# Allegro board pc053a_toplevel_33_ans_16-5.brd
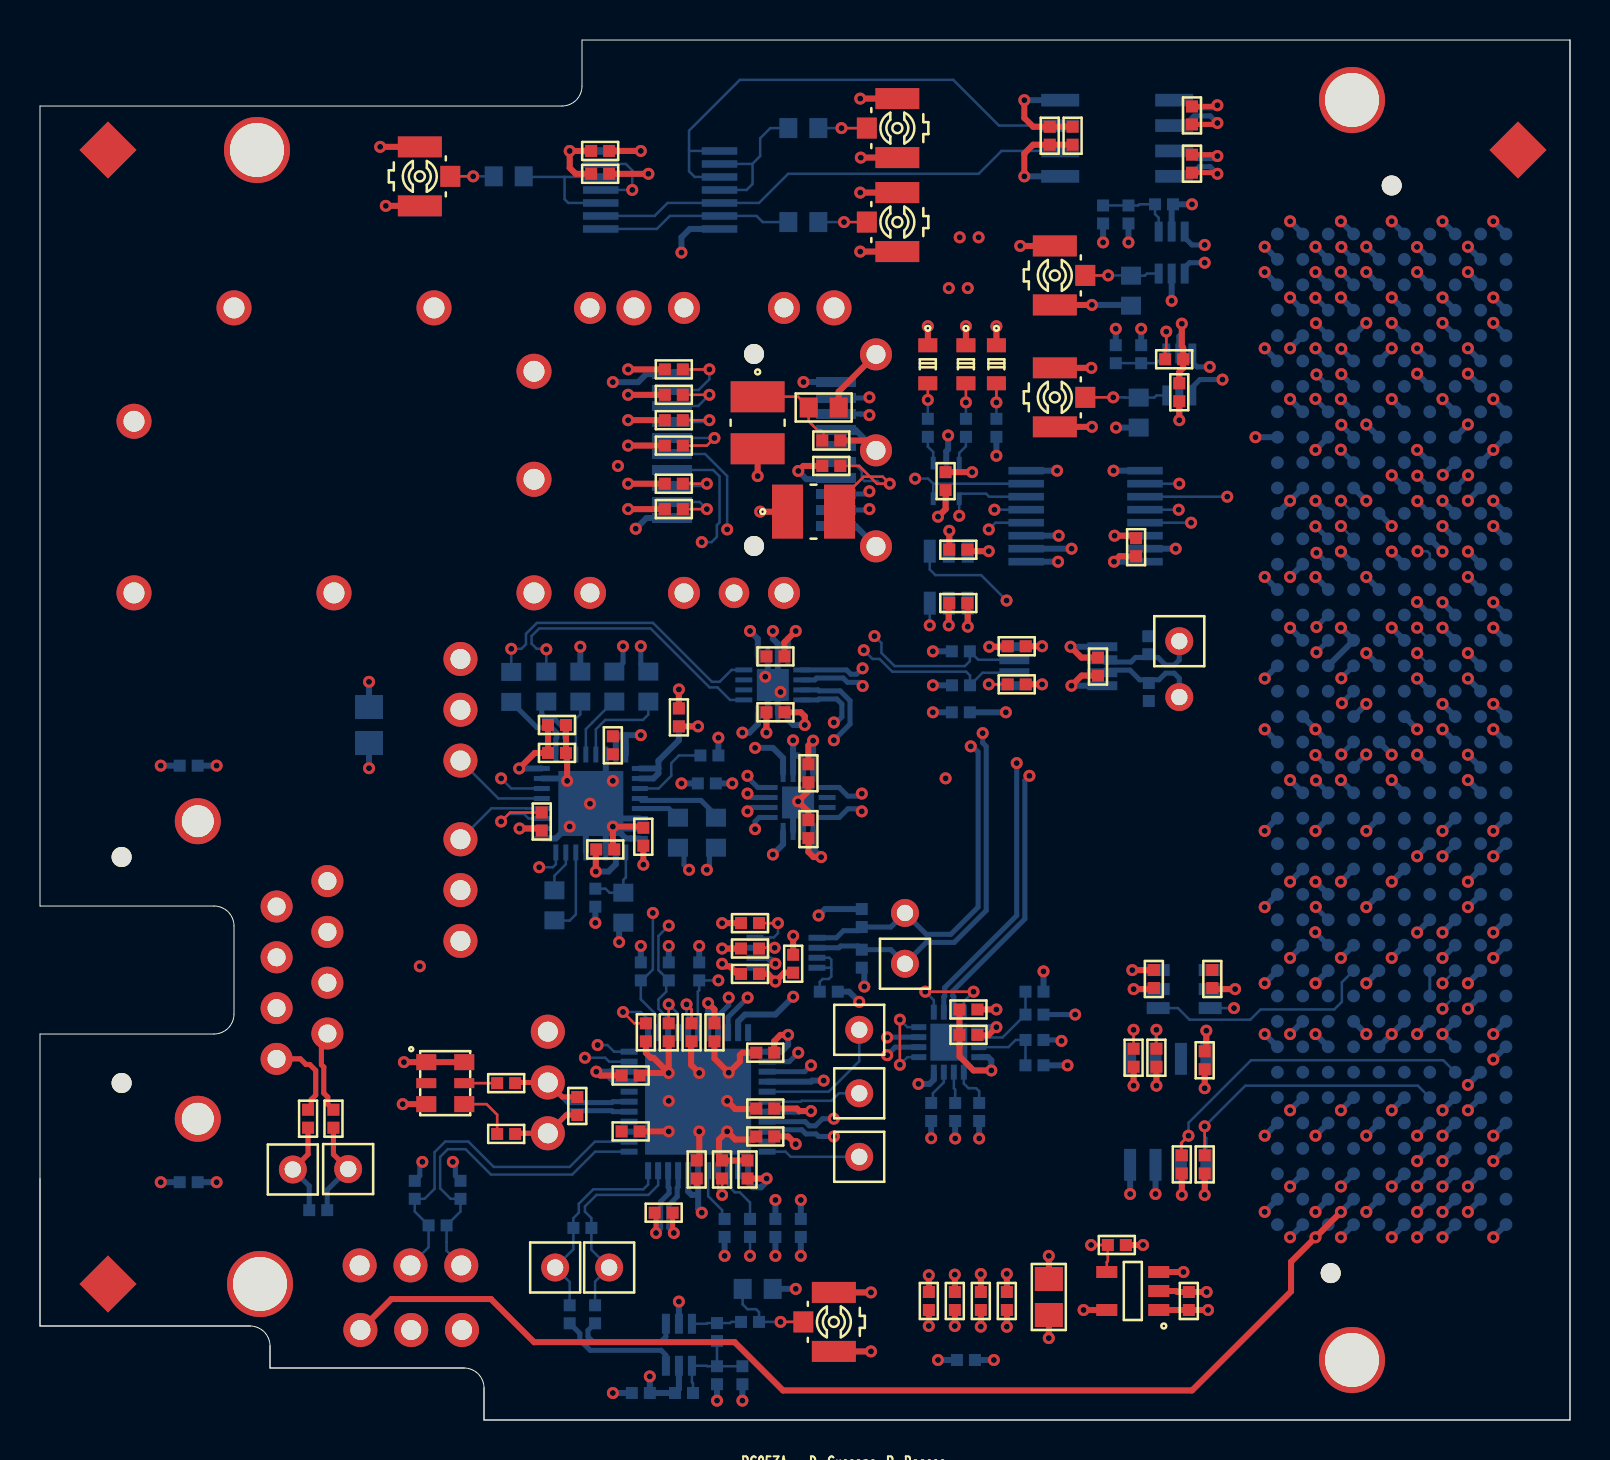
[diagram p0: board, top side]
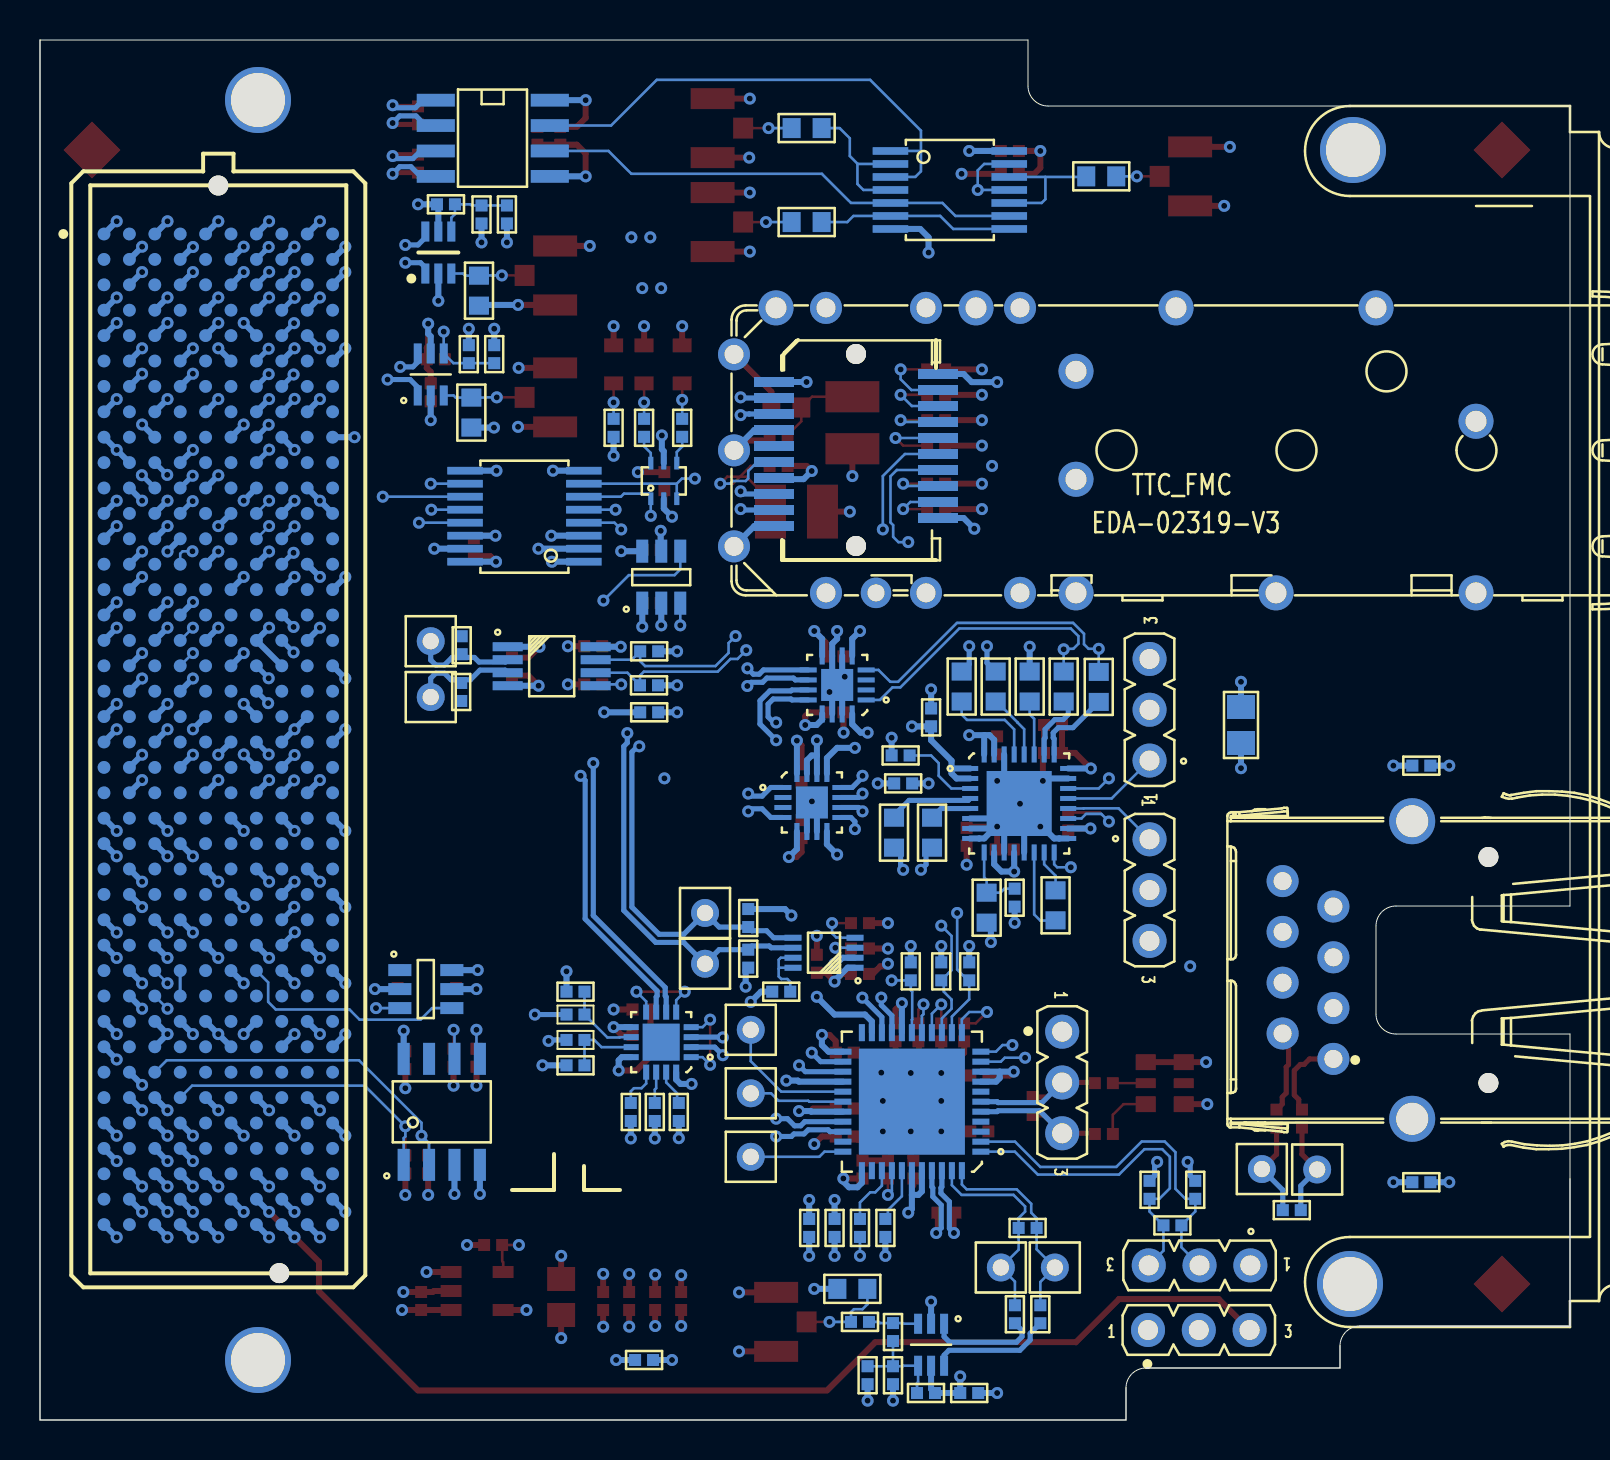
[diagram p1: board, bottom side, seen from below]

Outline 76.5 x 69 mm; copper layers: TOP, L2GND, INNER3, INNER4, L3PWR, BOTTOM. Coordinates in mm from the lower left corner of the outline.
Outline path: 0,4.7 0,19.3 8.7,19.3 arc(9.41,19.59) 9.7,20.3 9.7,24.7 arc(9.41,25.41) 8.7,25.7 0,25.7 0,65.7 26.1,65.7 arc(26.81,65.99) 27.1,66.7 27.1,69 76.5,69 ; 0,4.7 0,12.06 ; 0,4.7 10.5,4.7 ; 0,4.7 10.5,4.7 ; 10.5,4.7 arc(11.21,4.41) 11.5,3.7 ; 11.5,3.7 11.5,2.6 ; 11.5,3.7 11.5,2.6 ; 11.5,2.6 21.2,2.6 ; 11.5,2.6 21.2,2.6 ; 21.2,2.6 arc(21.91,2.31) 22.2,1.6 ; 22.2,1.6 22.2,0 ; 22.2,1.6 22.2,0 ; 22.2,0 76.5,0 ; 22.2,0 76.5,0 ; 76.5,0 76.5,69 ; 76.5,0 76.5,69

## Design rules (mm)
constraint set DEFAULT: min track width 0.127, pair gap 0.152
net group CLK_IN0: nets CLK_IN0_N CLK_IN0_P
net group CLK_IN1: nets CLK_IN1_N CLK_IN1_P
net group CLK_IN2: nets CLK_IN2_N CLK_IN2_P
net group F_CDR_CLK: nets F_CDR_CLK_N F_CDR_CLK_P
net group F_CDR_D: nets F_CDR_D_N F_CDR_D_P
net group F_FMC_CLK: nets F_FMC_CLK_N F_FMC_CLK_P
net group F_GPIO_OUT0: nets F_GPIO_OUT0_N F_GPIO_OUT0_P
net group F_GPIO_OUT1: nets F_GPIO_OUT1_N F_GPIO_OUT1_P
net group FFD_CLK: nets T_FFD_CLK_N T_FFD_CLK_P
net group FFD_DI: nets T_FFD_D_N T_FFD_D_P
net group FMC_CLK: nets T_FMC_CLK_N T_FMC_CLK_P
net group FMC_DI: nets FMC_DI_N FMC_DI_P
net group FMC_LA07: nets FMC_LA07_N FMC_LA07_P
net group FMC_LA11: nets FMC_LA11_N FMC_LA11_P
net group FMC_REC_CLK: nets T_FMC_REC_CLK_N T_FMC_REC_CLK_P
net group GPIO_IN0: nets GPIO_IN0_N GPIO_IN0_P
net group GPIO_IN1: nets GPIO_IN1_N GPIO_IN1_P
net group IN: nets IN_N IN_P
net group OSC_CLK: nets OSC_CLK_N OSC_CLK_P
net group PAR_CLKI: nets F_RJ45_CLK_N F_RJ45_CLK_P
net group PAR_CLKO: nets T_RJ45_CLK_N T_RJ45_CLK_P
net group PAR_DI: nets T_RJ45_D_N T_RJ45_D_P
net group PAR_DO: nets F_RJ45_D_N F_RJ45_D_P
net group REC_CLK: nets REC_CLK_N REC_CLK_P
net group SERPAR_CLKI: nets F_MCX_CLK_N F_MCX_CLK_P
net group SFP_DI: nets F_SFP_N F_SFP_P
net group SFP_DO: nets T_SFP_N T_SFP_P
net group SY5860_IN: nets SY5860_IN_N SY5860_IN_P
net group T_CDR: nets T_CDR_N T_CDR_P
net group T_FMC: nets T_FMC_N T_FMC_P
nets with their own width: min track width 0.3; nets CTRLVCC CVCC GND P1V8 P3V3 P12V VCC

## Placement (name value [footprint] x y rotation side)
C1  100nF  [C0402]  49.72 20.27 0 bottom
C2  100nF  [C0402]  49.72 19 0 bottom
C3  100nF  [C0402]  7.43 11.89 180 bottom
C4  100nF  [C0402]  7.43 32.72 180 bottom
C5  100nF  [C0402]  46.3 3 0 bottom
C6  100nF  [C0402]  46.04 35.38 0 bottom
C7  100nF  [C0402]  46.42 20.53 0 top
C8  100nF  [C0402]  46.42 19.26 0 top
C9  100nF  [C0402]  57.44 5.95 270 top
C10  100nF  [C0402]  36.77 9.6 90 bottom
C11  100nF  [C0402]  53.84 8.75 180 top
C12  2.2uF  [C0805]  50.44 6.15 270 top
C13  100nF  [C0402]  48.34 5.95 270 top
C14  100nF  [C0402]  47.04 5.95 270 top
C15  100nF  [C0402]  45.28 46.94 90 top
C16  100nF  [C0402]  52.9 37.67 90 top
C17  100nF  [C0402]  35.5 22.3 180 top
C18  100nF  [C0402]  58.23 17.99 90 top
C19  100nF  [C0402]  45.74 5.95 270 top
C20  100nF  [C0402]  44.44 5.95 270 top
C21  100nF  [C0402]  23.31 14.3 0 top
C22  100nF  [C0402]  13.4 15.06 270 top
C23  100nF  [C0402]  27.75 5.29 90 bottom
C24  100nF  [C0402]  21.02 11.51 270 bottom
C25  100nF  [C0402]  23.31 16.84 0 top
C26  100nF  [C0402]  26.48 5.29 90 bottom
C27  100nF  [C0402]  18.74 11.51 270 bottom
C28  100nF  [C0402]  14.67 15.06 270 top
C29  100nF  [C0402]  30.17 29.16 270 top
C30  1.0nF  [C0402]  25.85 34.75 180 top
C31  100nF  [C0402]  29.53 17.22 180 top
C32  100nF  [C0402]  36.26 15.57 0 top
C33  100nF  [C0402]  28.64 33.73 90 top
C34  1.0nF  [C0402]  31.94 35.13 270 top
C35  10uF  [C0805]  16.45 34.75 270 bottom
C36  100nF  [C0402]  28.26 28.53 180 top
C37  1.0nF  [C0402]  25.85 33.35 180 top
C38  100nF  [C0402]  33.47 33.23 180 bottom
C39  470nF  [C0603]  25.72 25.73 270 bottom
C40  100nF  [C0402]  33.34 31.83 180 bottom
C41  1.0nF  [C0402]  31.94 35.13 270 bottom
C42  100nF  [C0402]  27.77 26.11 90 bottom
C43  1.5uF  [C0603]  31.9 29.37 90 bottom
C44  1.5uF  [C0603]  33.8 29.37 90 bottom
C45  100nF  [C0402]  36.26 14.18 0 top
C46  100nF  [C0402]  36.26 18.37 0 top
C47  100nF  [C0402]  38.04 9.6 90 bottom
C48  100nF  [C0402]  32.83 12.53 270 top
C49  100nF  [C0402]  33.72 19.38 90 top
C50  100nF  [C0402]  35.5 4.91 180 bottom
C51  100nF  [C0402]  33.85 2.24 90 bottom
C52  100nF  [C0402]  54.42 60.28 90 bottom
C53  100nF  [C0402]  55.06 53.29 270 bottom
C54  100nF  [C0402]  30.04 1.35 180 bottom
C55  100nF  [C0402]  35.37 12.53 90 top
C56  100nF  [C0402]  56.96 51.39 270 top
C57  100nF  [C0402]  51.63 64.21 90 top
C58  100nF  [C0402]  50.49 64.21 90 top
C59  100nF  [C0402]  28.01 63.45 0 top
C60  100nF  [C0402]  28.01 62.31 0 top
C61  100nF  [C0402]  54.8 43.64 270 top
C62  100nF  [C0402]  39.56 47.7 0 top
C63  100nF  [C0402]  39.56 48.97 180 top
C64  10uF  [C0603]  39.18 50.62 180 top
C65  100nF  [C0402]  58.61 22.05 90 top
C66  100nF  [C0402]  45.91 40.85 0 top
C67  100nF  [C0402]  55.69 22.05 90 top
C68  100nF  [C0402]  45.91 43.51 0 top
C69  100nF  [C0402]  38.42 29.54 270 top
C70  100nF  [C0402]  38.42 32.34 90 top
C71  100nF  [C0402]  36.77 38.18 0 top
C72  100nF  [C0402]  36.77 35.38 0 top
C107  100nF  [C0402]  48.84 38.69 180 top
C117  100nF  [C0402]  37.66 22.81 90 top
IC1  -  [SOP50P310X90-8N]  37.3 23.36 0 bottom
IC2  -  [SOIC127P600X175-8N]  56.41 15.41 90 bottom
IC3  -  [QFN50P300X300X100-17N-S185]  45.44 18.89 0 bottom
IC4  -  [QFN50P700X700X90-45N-S530]  32.91 15.92 0 bottom
IC5  -  [SOP65P210X110-6N]  31.94 3.76 270 bottom
IC6  -  [SOP65P210X110-6N]  56.58 58.37 90 bottom
IC7  -  [SOP65P210X110-6N]  56.96 52.28 90 bottom
IC8  -  [SOIC8S_127]  56.71 65.99 270 bottom
IC9  -  [TSSOP14MA_065]  33.98 63.45 270 bottom
IC10  -  [TSSOP16MA_065]  49.31 42.91 90 bottom
IC11  -  [SC70_6L]  45.96 46.06 180 bottom
IC12  -  [QFN50P500X500X100-33N-S325]  27.54 30.83 180 bottom
IC13  -  [QFN50P300X300X90-17N-S160]  37.9 30.88 180 bottom
IC14  -  [SOT95P280X145-6N]  45.44 42.14 90 bottom
IC15  -  [SOP65P490X110-8N]  50.91 37.69 180 bottom
IC16  -  [SOT95P280X145-6N]  57.21 21.55 180 bottom
IC17  -  [QFN50P300X300X90-17N-S160]  36.64 36.75 0 bottom
J1  -  [MOLEX_44661-1011]  6.74 22.5 0 bottom
J2  -  [SAMTEC_MTLW-103-07-L-S-250]  25.39 16.88 270 bottom
J3  -  [SAMTEC_MTLW-103-07-L-S-250]  18.52 7.73 0 bottom
J4  -  [TYCO_1888247-1]  35.7 48.5 0 bottom
J5  -  [SAMTEC_MTLW-103-07-L-S-250]  21.02 26.5 270 bottom
J6  -  [SAMTEC_MTLW-103-07-L-S-250]  21.02 35.51 90 bottom
J8  -  [SAMTEC_MTLW-103-07-L-S-250]  18.56 4.5 180 bottom
L1  4.7uH  [INDC3225X220N]  35.88 49.86 270 top
L2  4.7uH  [INDC3225X220N]  38.68 45.42 0 top
LD1  Green  [LEDC1708X65N]  46.3 52.78 270 top
LD2  Green  [LEDC1708X65N]  44.39 52.78 270 top
LD3  Green  [LEDC1708X65N]  47.82 52.78 270 top
NOREF  -  []  36.8 -3.6 0 top
NOREF#2  -  []  14.55 96.4 0 top
NOREF#3  -  []  22.2 -3 0 top
NOREF#4  -  []  -18.77 249.4 0 top
NOREF#5  -  [unnamed#2]  10.85 63.5 0 top
NOREF#6  -  []  26.9 66.1 0 top
NOREF#7  -  []  65.6 3 0 top
NOREF#8  -  []  -14.3 168 0 top
NOREF#9  -  []  193.22 -17.27 0 top
NOREF#10  -  []  0 -3 0 top
NOREF#11  -  []  11.5 2.6 0 top
NOREF#12  -  []  0 4.7 90 top
NOREF#13  -  [unnamed#2]  11 6.8 0 top
NOREF#14  -  []  -17.4 -17.4 0 top
NOREF#15  -  []  133.3 -3.6 0 top
NOREF#16  -  []  11.21 4.4 0 top
NOREF#17  -  []  79.5 0 90 top
NOREF#18  -  []  -2.4 48 0 top
NOREF#19  -  []  22.2 0 90 top
NOREF#20  -  []  -17.4 170.4 0 top
NOREF#21  -  []  11 63.45 90 top
NOREF#22  -  []  109.15 64.3 0 top
NOREF#23  -  []  -38.5 -28.4 0 top
NOREF#24  -  []  96.5 -16 0 top
NOREF#25  -  []  -17.4 -17.4 0 top
NOREF#26  -  []  -19.38 84 0 top
NOREF#27  -  []  76 185.5 0 top
NOREF#28  -  []  -17.4 -17.4 0 top
NOREF#29  -  [unnamed#3]  73.9 63.5 0 top
NOREF#30  -  []  -18.77 254.4 0 top
NOREF#31  -  []  266.9 -16.15 0 top
NOREF#32  -  [unnamed#2]  65.6 3 0 top
NOREF#33  -  []  180.4 -21.05 0 top
NOREF#34  -  []  76 219.5 0 top
NOREF#35  -  []  27.1 69 0 top
NOREF#36  -  []  11.5 2.6 90 top
NOREF#37  -  []  173 -16 0 top
NOREF#38  -  []  76.5 0 90 top
NOREF#39  -  []  76.5 -16 0 top
NOREF#40  -  [unnamed#2]  65.6 66 0 top
NOREF#41  -  []  76 101.5 0 top
NOREF#42  -  []  79.4 51.5 0 top
NOREF#43  -  []  11.5 -2.5 0 top
NOREF#44  -  []  -7.4 -16.15 0 top
NOREF#45  -  [unnamed#3]  3.4 63.5 0 top
NOREF#46  -  []  0 65.7 0 top
NOREF#47  -  []  0 65.7 0 top
NOREF#48  -  []  76 17.5 0 top
NOREF#49  -  []  -19.38 153 0 top
NOREF#50  -  []  -14.4 -12.4 0 top
NOREF#51  -  []  -14.3 0 0 top
NOREF#52  -  []  0 0 0 top
NOREF#53  -  []  22 2.2 0 top
NOREF#54  -  []  2.6 -16.15 0 top
NOREF#55  -  []  0 -16 0 top
NOREF#56  -  [unnamed#3]  3.4 6.8 0 top
NOREF#57  -  []  -14.4 165.4 0 top
NOREF#58  -  []  12.65 64.3 0 top
NOREF#59  -  []  -14.3 69 0 top
NOREF#60  -  []  0 64.3 0 top
NOREF#61  -  []  0 4.65 0 top
NOREF#62  -  []  76 135.5 0 top
NOREF#63  -  []  -14.3 237 0 top
P1  -  [SAMTEC_SEAM-40-035-S-10-2-A]  67.58 34.53 90 bottom
PX1  -  [HIROSE_U-FL-R-SMT-1_10]  39.69 4.91 90 top
PX2  -  [HIROSE_U-FL-R-SMT-1_10]  50.74 57.23 270 top
PX3  -  [HIROSE_U-FL-R-SMT-1_10]  50.74 51.13 270 top
PX4  -  [HIROSE_U-FL-R-SMT-1_10]  18.99 62.18 270 top
PX5  -  [HIROSE_U-FL-R-SMT-1_10]  42.87 59.9 90 top
PX6  -  [HIROSE_U-FL-R-SMT-1_10]  42.87 64.59 90 top
QZ1  40.00MHz  [OSCSC105P250X320X180-6N]  20.26 16.84 0 top
R1  200k  [C0402]  39.44 21.41 0 bottom
R2  2k  [C0402]  44.56 15.4 90 bottom
R3  2k  [C0402]  46.96 15.4 270 bottom
R4  2k  [C0402]  45.76 15.4 270 bottom
R5  150  [C0402]  49.72 21.41 180 bottom
R6  150  [C0402]  49.72 17.73 180 bottom
R7  100  [C0402]  26.86 15.7 90 top
R8  100  [C0402]  13.91 10.49 0 bottom
R9  100  [C0402]  27.12 9.6 180 bottom
R10  1k  [C0402]  30.29 19.38 270 top
R11  100  [C0402]  19.88 9.73 0 bottom
R12  00  [C0603]  27.02 36.67 90 bottom
R13  4.7k  [C0402]  34.23 9.6 270 bottom
R14  4.7k  [C0402]  31.44 22.43 90 bottom
R15  4.7k  [C0402]  30.04 22.43 90 bottom
R16  4.7k  [C0402]  32.96 22.43 90 bottom
R17  1k  [C0402]  29.53 14.43 180 top
R18  100  [C0402]  31.18 10.37 0 top
R19  1k  [C0402]  34.1 12.53 270 top
R20  1k  [C0402]  31.44 19.38 270 top
R21  1k  [C0402]  32.58 19.38 270 top
R22  4.7k  [C0402]  31.69 52.53 0 top
R23  4.7k  [C0402]  31.69 51.26 0 top
R24  4.7k  [C0402]  31.69 49.99 180 top
R25  4.7k  [C0402]  31.69 48.72 180 top
R26  33  [C0402]  35.5 9.6 270 bottom
R27  51  [C0603]  35.88 6.56 180 bottom
R28  4.7k  [C0402]  31.69 46.81 0 top
R29  4.7k  [C0402]  31.69 45.55 0 top
R30  51  [C0603]  54.55 56.47 90 bottom
R31  51  [C0603]  54.93 50.37 90 bottom
R32  2k  [C0402]  32.2 1.35 180 bottom
R33  2k  [C0402]  35.12 2.24 90 bottom
R34  00  [C0603]  29.17 25.61 90 bottom
R35  3.0k  [C0402]  56.2 60.78 0 bottom
R36  2k  [C0402]  53.15 60.28 90 bottom
R37  3.0k  [C0402]  56.71 53.04 0 top
R38  2k  [C0402]  53.79 53.29 270 bottom
R39  4.7k  [C0402]  54.68 18.11 270 top
R40  4.7k  [C0402]  35.5 24.84 0 top
R41  4.7k  [C0402]  35.5 23.57 0 top
R42  4.7k  [C0402]  48.84 36.78 0 top
R43  4.7k  [C0402]  41.09 23.07 270 bottom
R44  1k  [C0402]  33.85 4.4 90 bottom
R45  51  [C0402]  57.6 62.82 90 top
R46  51  [C0402]  57.6 65.23 270 top
R47  33  [C0603]  23.44 62.18 180 bottom
R48  33  [C0603]  38.17 59.9 0 bottom
R49  33  [C0603]  38.17 64.59 0 bottom
R50  750  [C0402]  46.3 49.61 270 bottom
R51  750  [C0402]  44.39 49.61 270 bottom
R52  00  [C0603]  30.42 36.67 90 bottom
R53  00  [C0603]  28.72 36.67 90 bottom
R54  00  [C0603]  25.32 36.67 90 bottom
R55  00  [C0603]  23.56 36.66 90 bottom
R56  750  [C0402]  47.82 49.61 270 bottom
R57  2k  [C0402]  25.09 29.92 270 top
R103  4.7k  [C0402]  55.82 18.11 270 top
R138  4.7k  [C0402]  57.09 12.78 270 top
R140  4.7k  [C0402]  46.05 36.73 0 bottom
R142  4.7k  [C0402]  55.44 36.4 270 bottom
R143  4.7k  [C0402]  55.41 38.74 90 bottom
R242  4.7k  [C0402]  41.09 25.1 90 bottom
R411  4.7k  [C0402]  46.04 38.43 0 bottom
R1328  4.7k  [C0402]  58.23 12.78 270 top
REG1  -  [SOT95P280X110-5N]  54.64 6.45 180 top
SFP1  -  [MOLEX_74737004]  35.6 48.45 0 bottom
TP1  -  [TP_HOLE_08]  43.25 25.35 0 bottom
TP2  -  [TP_HOLE_08]  56.96 36.15 0 bottom
TP3  -  [TP_HOLE_08]  43.25 22.81 0 bottom
TP4  -  [TP_HOLE_08]  56.96 38.94 0 bottom
TP5  -  [TP_HOLE_08]  12.64 12.53 270 bottom
TP6  -  [TP_HOLE_08]  15.41 12.55 270 bottom
TP7  -  [TP_HOLE_08]  28.46 7.62 0 bottom
TP8  -  [TP_HOLE_08]  25.76 7.62 0 bottom
TP9  -  [TP_HOLE_08]  40.96 13.16 0 bottom
TP10  -  [TP_HOLE_08]  40.96 19.51 0 bottom
TP11  -  [TP_HOLE_08]  40.96 16.34 0 bottom

## Library data of the parts
C1-C9 C11 C13-C20 C29 C31-C33 C36 C38 C40 C42 C45-C49 C61-C63 C69-C72 C107 C117 = CAPCERSMDCL2: part number: CAPCERSMDCL2_0402-100NF,16V_GEN; tolerance: 10%
C10 C21-C28 C50-C60 C65-C68 = CAPCERSMDCL2: part number: CAPCERSMDCL2_0402-100NF_X7R,16V; tolerance: 10%
C12 = CAPCERSMDCL2: part number: CAPCERSMDCL2_0805-2.2UF,10V_GEN; tolerance: +80%-20%
C30 C34 C37 C41 = CAPCERSMDCL2: part number: CAPCERSMDCL2_0402-1.0NF,50V_GEN; tolerance: 10%
C35 = CAPCERSMDCL2: part number: CAPCERSMDCL2_0805-10UF,16V; tolerance: 10%
C39 = CAPCERSMDCL2: part number: CAPCERSMDCL2_0603-470NF,6.3V; tolerance: 10%
C43 C44 = CAPCERSMDCL2: part number: CAPCERSMDCL2_0603-1.5UF,6.3V; tolerance: 10%
C64 = CAPCERSMDCL2: part number: CAPCERSMDCL2_0603-10UF_X5R,6.3V; tolerance: 5%
IC1 = PCA9306: part number: PCA9306DCU
IC2 = 24AA025E48: part number: 24AA025E48T-I/SN
IC3 = NBSG53A: part number: NBSG53AMNG
IC4 = SI5344: part number: SI5344B-B-GM
IC5-IC7 = ADCMP604: part number: ADCMP604BKSZ
IC8 = DS90LV028A
IC9 = 74LCX04: part number: 74LCX04MTC
IC10 = 74AVC4T245: part number: SN74AVC4T245PW
IC11 = SN74LVC2GU04: part number: SN74LVC2GU04DCK
IC12 = ADN2814: part number: ADN2814ACPZ
IC13 IC17 = SY58608U: part number: SY58608UMG
IC14 IC16 = 74AVC1T45: part number: SN74AVC1T45DCKR
IC15 = PCA9517: part number: PCA9517DGKR
J1 = CON8P: part number: CON8P-44661-1011
J2 J3 J5 J6 J8 = CON3P: part number: CON3P-MTLW-103-07-L-S-250
J4 = CON20P_SFP: part number: CON20P_SFP-1888247-1
L1 L2 = INDUCTANCE: part number: INDUCTANCE_LQH32C_23-4.7UH
LD1-LD3 = LED1: part number: LGL29K-G2J1-24
P1 = CON400P_40ABCDEFGHJK: part number: CON400P_40ABCDEFGHJK-SEAM-40-03.5-S-10-2-A-K-TR
PX1-PX6 = PCOAX: part number: PCOAX-U.FL-R-SMT-1(10)
QZ1 = DSC1123CI5: part number: DSC1123CI5-40.0000
R1 = RSMD0402: part number: RSMD0402_1/16W-200K,1%; tolerance: 1%
R2-R4 R32 R33 R36 R38 R57 = RSMD0402: part number: RSMD0402_1/16W-2K,1%; tolerance: 1%
R5 R6 = RSMD0402: part number: RSMD0402_1/16W-150,1%; tolerance: 1%
R7-R9 R11 R18 = RSMD0402: part number: RSMD0402_1/16W-100,1%; tolerance: 1%
R10 R17 R19-R21 R44 = RSMD0402: part number: RSMD0402_1/16W-1K,1%; tolerance: 1%
R12 R34 R52-R55 = RSMD0603: part number: RSMD0603_-00,
R13-R16 R22-R25 R28 R29 R39-R43 R103 R138 R140 R142 R143 R242 R411 R1328 = RSMD0402: part number: RSMD0402_1/16W-4.7K,1%; tolerance: 1%
R26 = RSMD0402: part number: RSMD0402_1/16W-33,1%; tolerance: 1%
R27 R30 R31 = RSMD0603: part number: RSMD0603_1/10W-51,1%; tolerance: 1%
R35 R37 = RSMD0402: part number: RSMD0402_1/16W-3.0K,1%; tolerance: 1%
R45 R46 = RSMD0402: part number: RSMD0402_1/16W-51R,5%; tolerance: 5%
R47-R49 = RSMD0603: part number: RSMD0603_1/10W-33,1%; tolerance: 1%
R50 R51 R56 = RSMD0402: part number: RSMD0402_1/16W-750,1%; tolerance: 1%
REG1 = TPS799XX: part number: TPS799185DDCTG4
SFP1 = SFP_CAGE: part number: SFP_CAGE-SP-74737-004
TP1-TP11 = TP: part number: TP_HOLE-0.8MM

## Footprints (pads in the part's own frame, mm; a bottom-side part is the same pattern mirrored in y, then rotated)
C0402
  rect 0.6x0.6 smd: 1(-0.45,0) 2(0.45,0)
C0603
  rect 0.9x1 smd: 1(-0.75,0) 2(0.75,0)
C0805
  rect 1.2x1.4 smd: 1(-0.9,0) 2(0.9,0)
HIROSE_U-FL-R-SMT-1_10
  rect 1.05x1 smd: 1(0,1.525)
  rect 1.05x2.2 smd: 2(-1.475,0) 3(1.475,0)
INDC3225X220N
  rect 1.55x2.7 smd: 1(-1.3,0) 2(1.3,0)
LEDC1708X65N
  rect 0.7x0.95 smd: 1(0.95,0) 2(-0.95,0)
MOLEX_44661-1011
  round 1 hole 3.25 unplated: (-2.66,-5.65) (-2.66,5.65)
  round 1.6 hole 0.9: 1(5.09,4.445) 2(7.63,3.175) 3(5.09,1.905) 4(7.63,0.635) 5(5.09,-0.635) 6(7.63,-1.905) 7(5.09,-3.175) 8(7.63,-4.445)
  round 2.3 hole 1.6: 9(1.15,7.44) 10(1.15,-7.44)
MOLEX_74737004
  round 1.524 hole 0.85: 1(-0.9,7.094)
  round 1.75 hole 1.05: 2(-10.9,7.094) 3(-20.9,7.094) 4(-30.9,7.094) 5(-25.9,-7.156) 6(-15.9,-7.156) 7(-5.9,-7.156) 8(4.1,-7.156) 9(-10.9,1.414) 10(-10.9,-3.986) 11(-30.9,-1.486)
  round 1.6 hole 0.95: 12(-8.1,7.094) 13(-8.1,-7.156) 14(-3.4,7.094) 15(-3.4,-7.156) 16(1.6,7.094) 17(1.6,-7.156) 18(6.2,4.769) 19(6.2,-0.031) 20(6.2,-4.831)
  round 0 smd: NC(-4.1,3.369)
OSCSC105P250X320X180-6N
  rect 1x0.8 smd: 1(-0.95,1.05) 3(-0.95,-1.05) 4(0.95,-1.05) 6(0.95,1.05)
  rect 1x0.5 smd: 2(-0.95,0) 5(0.95,0)
QFN50P300X300X90-17N-S160
  rect 0.85x0.25 smd: 1(-1.45,0.75) 2(-1.45,0.25) 3(-1.45,-0.25) 4(-1.45,-0.75) 9(1.45,-0.75) 10(1.45,-0.25) 11(1.45,0.25) 12(1.45,0.75)
  rect 0.25x0.85 smd: 5(-0.75,-1.45) 6(-0.25,-1.45) 7(0.25,-1.45) 8(0.75,-1.45) 13(0.75,1.45) 14(0.25,1.45) 15(-0.25,1.45) 16(-0.75,1.45)
  rect 1.6x1.6 smd: 17(0,0)
QFN50P300X300X100-17N-S185
  rect 0.75x0.3 smd: 1(-1.5,0.75) 2(-1.5,0.25) 3(-1.5,-0.25) 4(-1.5,-0.75) 9(1.5,-0.75) 10(1.5,-0.25) 11(1.5,0.25) 12(1.5,0.75)
  rect 0.3x0.75 smd: 5(-0.75,-1.5) 6(-0.25,-1.5) 7(0.25,-1.5) 8(0.75,-1.5) 13(0.75,1.5) 14(0.25,1.5) 15(-0.25,1.5) 16(-0.75,1.5)
  rect 1.85x1.85 smd: 17(0,0)
QFN50P500X500X100-33N-S325
  rect 0.8x0.25 smd: 1(-2.45,1.75) 2(-2.45,1.25) 3(-2.45,0.75) 4(-2.45,0.25) 5(-2.45,-0.25) 6(-2.45,-0.75) 7(-2.45,-1.25) 8(-2.45,-1.75) 17(2.45,-1.75) 18(2.45,-1.25) 19(2.45,-0.75) 20(2.45,-0.25) 21(2.45,0.25) 22(2.45,0.75) 23(2.45,1.25) 24(2.45,1.75)
  rect 0.25x0.8 smd: 9(-1.75,-2.45) 10(-1.25,-2.45) 11(-0.75,-2.45) 12(-0.25,-2.45) 13(0.25,-2.45) 14(0.75,-2.45) 15(1.25,-2.45) 16(1.75,-2.45) 25(1.75,2.45) 26(1.25,2.45) 27(0.75,2.45) 28(0.25,2.45) 29(-0.25,2.45) 30(-0.75,2.45) 31(-1.25,2.45) 32(-1.75,2.45)
  rect 3.25x3.25 smd: 33(0,0)
QFN50P700X700X90-45N-S530
  rect 0.85x0.3 smd: 1(-3.45,2.5) 2(-3.45,2) 3(-3.45,1.5) 4(-3.45,1) 5(-3.45,0.5) 6(-3.45,0) 7(-3.45,-0.5) 8(-3.45,-1) 9(-3.45,-1.5) 10(-3.45,-2) 11(-3.45,-2.5) 23(3.45,-2.5) 24(3.45,-2) 25(3.45,-1.5) 26(3.45,-1) 27(3.45,-0.5) 28(3.45,0) 29(3.45,0.5) 30(3.45,1) 31(3.45,1.5) 32(3.45,2) 33(3.45,2.5)
  rect 0.3x0.85 smd: 12(-2.5,-3.45) 13(-2,-3.45) 14(-1.5,-3.45) 15(-1,-3.45) 16(-0.5,-3.45) 17(0,-3.45) 18(0.5,-3.45) 19(1,-3.45) 20(1.5,-3.45) 21(2,-3.45) 22(2.5,-3.45) 34(2.5,3.45) 35(2,3.45) 36(1.5,3.45) 37(1,3.45) 38(0.5,3.45) 39(0,3.45) 40(-0.5,3.45) 41(-1,3.45) 42(-1.5,3.45) 43(-2,3.45) 44(-2.5,3.45)
  rect 5.3x5.3 smd: 45(0,0)
SAMTEC_MTLW-103-07-L-S-250
  round 1.7 hole 1: 1(-2.54,0) 2(0,0) 3(2.54,0)
SAMTEC_SEAM-40-035-S-10-2-A
  round 1 hole 1.3 unplated: (-27.19,-3.05) (27.19,0)
  round 0.64 smd: A1(24.765,5.715) A2(23.495,5.715) A3(22.225,5.715) A4(20.955,5.715) A5(19.685,5.715) A6(18.415,5.715) A7(17.145,5.715) A8(15.875,5.715) A9(14.605,5.715) A10(13.335,5.715) A11(12.065,5.715) A12(10.795,5.715) A13(9.525,5.715) A14(8.255,5.715) A15(6.985,5.715) A16(5.715,5.715) A17(4.445,5.715) A18(3.175,5.715) A19(1.905,5.715) A20(0.635,5.715) A21(-0.635,5.715) A22(-1.905,5.715) A23(-3.175,5.715) A24(-4.445,5.715) A25(-5.715,5.715) A26(-6.985,5.715) A27(-8.255,5.715) A28(-9.525,5.715) A29(-10.795,5.715) A30(-12.065,5.715) A31(-13.335,5.715) A32(-14.605,5.715) A33(-15.875,5.715) A34(-17.145,5.715) A35(-18.415,5.715) A36(-19.685,5.715) A37(-20.955,5.715) A38(-22.225,5.715) A39(-23.495,5.715) A40(-24.765,5.715) B1(24.765,4.445) B2(23.495,4.445) B3(22.225,4.445) B4(20.955,4.445) B5(19.685,4.445) B6(18.415,4.445) B7(17.145,4.445) B8(15.875,4.445) B9(14.605,4.445) B10(13.335,4.445) B11(12.065,4.445) B12(10.795,4.445) B13(9.525,4.445) B14(8.255,4.445) B15(6.985,4.445) B16(5.715,4.445) B17(4.445,4.445) B18(3.175,4.445) B19(1.905,4.445) B20(0.635,4.445) B21(-0.635,4.445) B22(-1.905,4.445) B23(-3.175,4.445) B24(-4.445,4.445) B25(-5.715,4.445) B26(-6.985,4.445) B27(-8.255,4.445) B28(-9.525,4.445) B29(-10.795,4.445) B30(-12.065,4.445) B31(-13.335,4.445) B32(-14.605,4.445) B33(-15.875,4.445) B34(-17.145,4.445) B35(-18.415,4.445) B36(-19.685,4.445) B37(-20.955,4.445) B38(-22.225,4.445) B39(-23.495,4.445) B40(-24.765,4.445) C1(24.765,3.175) C2(23.495,3.175) C3(22.225,3.175) C4(20.955,3.175) C5(19.685,3.175) C6(18.415,3.175) C7(17.145,3.175) C8(15.875,3.175) C9(14.605,3.175) C10(13.335,3.175) C11(12.065,3.175) C12(10.795,3.175) C13(9.525,3.175) C14(8.255,3.175) C15(6.985,3.175) C16(5.715,3.175) C17(4.445,3.175) C18(3.175,3.175) C19(1.905,3.175) C20(0.635,3.175) C21(-0.635,3.175) C22(-1.905,3.175) C23(-3.175,3.175) C24(-4.445,3.175) C25(-5.715,3.175) C26(-6.985,3.175) C27(-8.255,3.175) C28(-9.525,3.175) C29(-10.795,3.175) C30(-12.065,3.175) C31(-13.335,3.175) C32(-14.605,3.175) C33(-15.875,3.175) C34(-17.145,3.175) C35(-18.415,3.175) C36(-19.685,3.175) C37(-20.955,3.175) C38(-22.225,3.175) C39(-23.495,3.175) C40(-24.765,3.175) D1(24.765,1.905) D2(23.495,1.905) D3(22.225,1.905) D4(20.955,1.905) D5(19.685,1.905) D6(18.415,1.905) D7(17.145,1.905) D8(15.875,1.905) D9(14.605,1.905) D10(13.335,1.905) D11(12.065,1.905) D12(10.795,1.905) D13(9.525,1.905) D14(8.255,1.905) D15(6.985,1.905) D16(5.715,1.905) D17(4.445,1.905) D18(3.175,1.905) D19(1.905,1.905) D20(0.635,1.905) D21(-0.635,1.905) D22(-1.905,1.905) D23(-3.175,1.905) D24(-4.445,1.905) D25(-5.715,1.905) D26(-6.985,1.905) D27(-8.255,1.905) D28(-9.525,1.905) D29(-10.795,1.905) D30(-12.065,1.905) D31(-13.335,1.905) D32(-14.605,1.905) D33(-15.875,1.905) D34(-17.145,1.905) D35(-18.415,1.905) D36(-19.685,1.905) D37(-20.955,1.905) D38(-22.225,1.905) D39(-23.495,1.905) D40(-24.765,1.905) E1(24.765,0.635) E2(23.495,0.635) E3(22.225,0.635) E4(20.955,0.635) E5(19.685,0.635) E6(18.415,0.635) E7(17.145,0.635) E8(15.875,0.635) E9(14.605,0.635) E10(13.335,0.635) E11(12.065,0.635) E12(10.795,0.635) E13(9.525,0.635) E14(8.255,0.635) E15(6.985,0.635) E16(5.715,0.635) E17(4.445,0.635) E18(3.175,0.635) E19(1.905,0.635) E20(0.635,0.635) E21(-0.635,0.635) E22(-1.905,0.635) E23(-3.175,0.635) E24(-4.445,0.635) E25(-5.715,0.635) E26(-6.985,0.635) E27(-8.255,0.635) E28(-9.525,0.635) E29(-10.795,0.635) E30(-12.065,0.635) E31(-13.335,0.635) E32(-14.605,0.635) E33(-15.875,0.635) E34(-17.145,0.635) E35(-18.415,0.635) E36(-19.685,0.635) E37(-20.955,0.635) E38(-22.225,0.635) E39(-23.495,0.635) E40(-24.765,0.635) F1(24.765,-0.635) F2(23.495,-0.635) F3(22.225,-0.635) F4(20.955,-0.635) F5(19.685,-0.635) F6(18.415,-0.635) F7(17.145,-0.635) F8(15.875,-0.635) F9(14.605,-0.635) F10(13.335,-0.635) F11(12.065,-0.635) F12(10.795,-0.635) F13(9.525,-0.635) F14(8.255,-0.635) F15(6.985,-0.635) F16(5.715,-0.635) F17(4.445,-0.635) F18(3.175,-0.635) F19(1.905,-0.635) F20(0.635,-0.635) F21(-0.635,-0.635) F22(-1.905,-0.635) F23(-3.175,-0.635) F24(-4.445,-0.635) F25(-5.715,-0.635) F26(-6.985,-0.635) F27(-8.255,-0.635) F28(-9.525,-0.635) F29(-10.795,-0.635) F30(-12.065,-0.635) F31(-13.335,-0.635) F32(-14.605,-0.635) F33(-15.875,-0.635) F34(-17.145,-0.635) F35(-18.415,-0.635) F36(-19.685,-0.635) F37(-20.955,-0.635) F38(-22.225,-0.635) F39(-23.495,-0.635) F40(-24.765,-0.635) G1(24.765,-1.905) G2(23.495,-1.905) G3(22.225,-1.905) G4(20.955,-1.905) G5(19.685,-1.905) G6(18.415,-1.905) G7(17.145,-1.905) G8(15.875,-1.905) G9(14.605,-1.905) G10(13.335,-1.905) G11(12.065,-1.905) G12(10.795,-1.905) G13(9.525,-1.905) G14(8.255,-1.905) G15(6.985,-1.905) G16(5.715,-1.905) G17(4.445,-1.905) G18(3.175,-1.905) G19(1.905,-1.905) G20(0.635,-1.905) G21(-0.635,-1.905) G22(-1.905,-1.905) G23(-3.175,-1.905) G24(-4.445,-1.905) G25(-5.715,-1.905) G26(-6.985,-1.905) G27(-8.255,-1.905) G28(-9.525,-1.905) G29(-10.795,-1.905) G30(-12.065,-1.905) G31(-13.335,-1.905) G32(-14.605,-1.905) G33(-15.875,-1.905) G34(-17.145,-1.905) G35(-18.415,-1.905) G36(-19.685,-1.905) G37(-20.955,-1.905) G38(-22.225,-1.905) G39(-23.495,-1.905) G40(-24.765,-1.905) H1(24.765,-3.175) H2(23.495,-3.175) H3(22.225,-3.175) H4(20.955,-3.175) H5(19.685,-3.175) H6(18.415,-3.175) H7(17.145,-3.175) H8(15.875,-3.175) H9(14.605,-3.175) H10(13.335,-3.175) H11(12.065,-3.175) H12(10.795,-3.175) H13(9.525,-3.175) H14(8.255,-3.175) H15(6.985,-3.175) H16(5.715,-3.175) H17(4.445,-3.175) H18(3.175,-3.175) H19(1.905,-3.175) H20(0.635,-3.175) H21(-0.635,-3.175) H22(-1.905,-3.175) H23(-3.175,-3.175) H24(-4.445,-3.175) H25(-5.715,-3.175) H26(-6.985,-3.175) H27(-8.255,-3.175) H28(-9.525,-3.175) H29(-10.795,-3.175) H30(-12.065,-3.175) H31(-13.335,-3.175) H32(-14.605,-3.175) H33(-15.875,-3.175) H34(-17.145,-3.175) H35(-18.415,-3.175) H36(-19.685,-3.175) H37(-20.955,-3.175) H38(-22.225,-3.175) H39(-23.495,-3.175) H40(-24.765,-3.175) J1(24.765,-4.445) J2(23.495,-4.445) J3(22.225,-4.445) J4(20.955,-4.445) J5(19.685,-4.445) J6(18.415,-4.445) J7(17.145,-4.445) J8(15.875,-4.445) J9(14.605,-4.445) J10(13.335,-4.445) J11(12.065,-4.445) J12(10.795,-4.445) J13(9.525,-4.445) J14(8.255,-4.445) J15(6.985,-4.445) J16(5.715,-4.445) J17(4.445,-4.445) J18(3.175,-4.445) J19(1.905,-4.445) J20(0.635,-4.445) J21(-0.635,-4.445) J22(-1.905,-4.445) J23(-3.175,-4.445) J24(-4.445,-4.445) J25(-5.715,-4.445) J26(-6.985,-4.445) J27(-8.255,-4.445) J28(-9.525,-4.445) J29(-10.795,-4.445) J30(-12.065,-4.445) J31(-13.335,-4.445) J32(-14.605,-4.445) J33(-15.875,-4.445) J34(-17.145,-4.445) J35(-18.415,-4.445) J36(-19.685,-4.445) J37(-20.955,-4.445) J38(-22.225,-4.445) J39(-23.495,-4.445) J40(-24.765,-4.445) K1(24.765,-5.715) K2(23.495,-5.715) K3(22.225,-5.715) K4(20.955,-5.715) K5(19.685,-5.715) K6(18.415,-5.715) K7(17.145,-5.715) K8(15.875,-5.715) K9(14.605,-5.715) K10(13.335,-5.715) K11(12.065,-5.715) K12(10.795,-5.715) K13(9.525,-5.715) K14(8.255,-5.715) K15(6.985,-5.715) K16(5.715,-5.715) K17(4.445,-5.715) K18(3.175,-5.715) K19(1.905,-5.715) K20(0.635,-5.715) K21(-0.635,-5.715) K22(-1.905,-5.715) K23(-3.175,-5.715) K24(-4.445,-5.715) K25(-5.715,-5.715) K26(-6.985,-5.715) K27(-8.255,-5.715) K28(-9.525,-5.715) K29(-10.795,-5.715) K30(-12.065,-5.715) K31(-13.335,-5.715) K32(-14.605,-5.715) K33(-15.875,-5.715) K34(-17.145,-5.715) K35(-18.415,-5.715) K36(-19.685,-5.715) K37(-20.955,-5.715) K38(-22.225,-5.715) K39(-23.495,-5.715) K40(-24.765,-5.715)
SC70_6L
  rect 0.254x0.635 smd: 1(0,0) 2(0.65,0) 3(1.3,0) 4(1.3,1.78) 5(0.65,1.78) 6(0,1.78)
SOIC8S_127
  rect 0.635x1.905 smd: 1(0,0) 2(1.27,0) 3(2.54,0) 4(3.81,0) 5(3.81,5.7) 6(2.54,5.7) 7(1.27,5.7) 8(0,5.7)
SOIC127P600X175-8N
  rect 1.6x0.6 smd: 1(-2.65,1.905) 2(-2.65,0.635) 3(-2.65,-0.635) 4(-2.65,-1.905) 5(2.65,-1.905) 6(2.65,-0.635) 7(2.65,0.635) 8(2.65,1.905)
SOP50P310X90-8N
  rect 0.85x0.3 smd: 1(-1.55,0.75) 2(-1.55,0.25) 3(-1.55,-0.25) 4(-1.55,-0.75) 5(1.55,-0.75) 6(1.55,-0.25) 7(1.55,0.25) 8(1.55,0.75)
SOP65P210X110-6N
  rect 1x0.4 smd: 1(-1.05,0.65) 2(-1.05,0) 3(-1.05,-0.65) 4(1.05,-0.65) 5(1.05,0) 6(1.05,0.65)
SOP65P490X110-8N
  rect 1.5x0.45 smd: 1(-2.2,0.975) 2(-2.2,0.325) 3(-2.2,-0.325) 4(-2.2,-0.975) 5(2.2,-0.975) 6(2.2,-0.325) 7(2.2,0.325) 8(2.2,0.975)
SOT95P280X110-5N
  rect 1.05x0.6 smd: 1(-1.3,0.95) 2(-1.3,0) 3(-1.3,-0.95) 4(1.3,-0.95) 5(1.3,0.95)
SOT95P280X145-6N
  rect 1.15x0.6 smd: 1(-1.3,0.95) 2(-1.3,0) 3(-1.3,-0.95) 4(1.3,-0.95) 5(1.3,0) 6(1.3,0.95)
TP_HOLE_08
  round 1.397 hole 0.813: 1(0,0)
TSSOP14MA_065
  rect 0.381x1.778 smd: 1(0,0) 2(0.65,0) 3(1.3,0) 4(1.95,0) 5(2.6,0) 6(3.25,0) 7(3.9,0) 8(3.9,5.94) 9(3.25,5.94) 10(2.6,5.94) 11(1.95,5.94) 12(1.3,5.94) 13(0.65,5.94) 14(0,5.94)
TSSOP16MA_065
  rect 0.381x1.778 smd: 1(0,0) 2(0.65,0) 3(1.3,0) 4(1.95,0) 5(2.6,0) 6(3.25,0) 7(3.9,0) 8(4.55,0) 9(4.55,5.94) 10(3.9,5.94) 11(3.25,5.94) 12(2.6,5.94) 13(1.95,5.94) 14(1.3,5.94) 15(0.65,5.94) 16(0,5.94)
TYCO_1888247-1
  round 1 hole 1.4 unplated: (0,-4.8) (0,4.8)
  rect 2x0.5 smd: 1(-4.1,3.4) 2(-4.1,2.6) 3(-4.1,1.8) 4(-4.1,1) 5(-4.1,0.2) 6(-4.1,-0.6) 7(-4.1,-1.4) 8(-4.1,-2.2) 9(-4.1,-3) 10(-4.1,-3.8) 11(4.1,-3.4) 12(4.1,-2.6) 13(4.1,-1.8) 14(4.1,-1) 15(4.1,-0.2) 16(4.1,0.6) 17(4.1,1.4) 18(4.1,2.2) 19(4.1,3) 20(4.1,3.8)
unnamed#2
  round 3.302 hole 2.7: (0,0)
unnamed#3
  rect 2.007x2.007 smd rot 135: (0,0)
  rect 2.007x2.007 smd rot 45: (0,0)

## Nets
GND: C3.2(B<0>) C4.2(B<0>) C5.2(B<0>) C6.2(B<0>) C7.1(A<0>) C8.1(A<0>) C9.1(A<0>) C10.1(A<0>) C11.1(A<0>) C12.1(A<0>) C13.1(A<0>) C14.1(A<0>) C15.1(A<0>) C16.1(A<0>) C17.1(A<0>) C18.1(A<0>) C19.1(A<0>) C20.1(A<0>) C29.1(A<0>) C30.1(A<0>) C31.1(A<0>) C32.1(A<0>) C33.1(A<0>) C34.1(A<0>) C35.1(A<0>) C36.1(A<0>) C37.1(A<0>) C38.1(A<0>) C40.1(A<0>) C41.1(A<0>) C42.1(A<0>) C45.1(A<0>) C46.1(A<0>) C47.1(A<0>) C48.1(A<0>) C49.1(A<0>) C51.1(A<0>) C52.1(A<0>) C53.1(A<0>) C54.2(B<0>) C55.2(B<0>) C56.2(B<0>) C57.1(A<0>) C58.1(A<0>) C59.1(A<0>) C60.1(A<0>) C61.1(A<0>) C62.1(A<0>) C63.1(A<0>) C64.1(A<0>) C65.1(A<0>) C66.1(A<0>) C67.1(A<0>) C68.1(A<0>) C69.1(A<0>) C70.1(A<0>) C71.1(A<0>) C72.1(A<0>) C107.1(A<0>) C117.1(A<0>) IC1.1 IC2.3(A2) IC2.4(VSS) IC3.12 IC3.16 IC4.45 IC5.2(VEE) IC6.2(VEE) IC7.2(VEE) IC8.5 IC9.7 IC10.8 IC10.9 IC10.14(2OE*) IC10.15(1OE*) IC11.2 IC12.6(SLICEP) IC12.7(SLICEN) IC12.8 IC12.11(REFCLKN) IC12.13 IC12.17 IC12.23 IC12.30 IC12.33(PAD) IC13.6 IC13.7 IC13.14 IC13.15 IC13.17 IC14.2(GND) IC14.5(DIR) IC15.4 IC16.2(GND) IC16.5(DIR) IC17.6 IC17.7 IC17.14 IC17.15 IC17.17 J1.9 J1.10 J2.1(A<0>) J3.1(A<0>) J4.1(VEET1) J4.10(VEER1) J4.11(VEER2) J4.14(VEER3) J4.17(VEET2) J4.20(VEET3) J5.2(A<1>) J6.2(A<1>) J8.1(A<0>) LD1.2(B) LD2.2(B) LD3.2(B) P1.A1(A<1>) P1.A4(A<4>) P1.A5(A<5>) P1.A8(A<8>) P1.A9(A<9>) P1.A12(A<12>) P1.A13(A<13>) P1.A16(A<16>) P1.A17(A<17>) P1.A20(A<20>) P1.A21(A<21>) P1.A24(A<24>) P1.A25(A<25>) P1.A28(A<28>) P1.A29(A<29>) P1.A32(A<32>) P1.A33(A<33>) P1.A36(A<36>) P1.A37(A<37>) P1.A40(A<40>) P1.B2(B<2>) P1.B3(B<3>) P1.B6(B<6>) P1.B7(B<7>) P1.B10(B<10>) P1.B11(B<11>) P1.B14(B<14>) P1.B15(B<15>) P1.B18(B<18>) P1.B19(B<19>) P1.B22(B<22>) P1.B23(B<23>) P1.B26(B<26>) P1.B27(B<27>) P1.B30(B<30>) P1.B31(B<31>) P1.B34(B<34>) P1.B35(B<35>) P1.B38(B<38>) P1.B39(B<39>) P1.C1(C<1>) P1.C4(C<4>) P1.C5(C<5>) P1.C8(C<8>) P1.C9(C<9>) P1.C12(C<12>) P1.C13(C<13>) P1.C16(C<16>) P1.C17(C<17>) P1.C20(C<20>) P1.C21(C<21>) P1.C24(C<24>) P1.C25(C<25>) P1.C28(C<28>) P1.C29(C<29>) P1.C32(C<32>) P1.C33(C<33>) P1.C36(C<36>) P1.C38(C<38>) P1.C40(C<40>) P1.D2(D<2>) P1.D3(D<3>) P1.D6(D<6>) P1.D7(D<7>) P1.D10(D<10>) P1.D13(D<13>) P1.D16(D<16>) P1.D19(D<19>) P1.D22(D<22>) P1.D25(D<25>) P1.D28(D<28>) P1.D37(D<37>) P1.D39(D<39>) P1.E1(E<1>) P1.E4(E<4>) P1.E5(E<5>) P1.E8(E<8>) P1.E11(E<11>) P1.E14(E<14>) P1.E17(E<17>) P1.E20(E<20>) P1.E23(E<23>) P1.E26(E<26>) P1.E29(E<29>) P1.E32(E<32>) P1.E35(E<35>) P1.E38(E<38>) P1.E40(E<40>) P1.F2(F<2>) P1.F3(F<3>) P1.F6(F<6>) P1.F9(F<9>) P1.F12(F<12>) P1.F15(F<15>) P1.F18(F<18>) P1.F21(F<21>) P1.F24(F<24>) P1.F27(F<27>) P1.F30(F<30>) P1.F33(F<33>) P1.F36(F<36>) P1.F39(F<39>) P1.G1(G<1>) P1.G4(G<4>) P1.G5(G<5>) P1.G8(G<8>) P1.G11(G<11>) P1.G14(G<14>) P1.G17(G<17>) P1.G20(G<20>) P1.G23(G<23>) P1.G26(G<26>) P1.G29(G<29>) P1.G32(G<32>) P1.G35(G<35>) P1.G38(G<38>) P1.G40(G<40>) P1.H2(H<2>) P1.H3(H<3>) P1.H6(H<6>) P1.H9(H<9>) P1.H12(H<12>) P1.H15(H<15>) P1.H18(H<18>) P1.H21(H<21>) P1.H24(H<24>) P1.H27(H<27>) P1.H30(H<30>) P1.H33(H<33>) P1.H36(H<36>) P1.H39(H<39>) P1.J1(J<1>) P1.J4(J<4>) P1.J5(J<5>) P1.J8(J<8>) P1.J11(J<11>) P1.J14(J<14>) P1.J17(J<17>) P1.J20(J<20>) P1.J23(J<23>) P1.J26(J<26>) P1.J29(J<29>) P1.J32(J<32>) P1.J35(J<35>) P1.J38(J<38>) P1.J40(J<40>) P1.K2(K<2>) P1.K3(K<3>) P1.K6(K<6>) P1.K9(K<9>) P1.K12(K<12>) P1.K15(K<15>) P1.K18(K<18>) P1.K21(K<21>) P1.K24(K<24>) P1.K27(K<27>) P1.K30(K<30>) P1.K33(K<33>) P1.K36(K<36>) P1.K39(K<39>) PX1.2 PX1.3 PX2.2 PX2.3 PX3.2 PX3.3 PX4.2 PX4.3 PX5.2 PX5.3 PX6.2 PX6.3 QZ1.3 R2.1(A<0>) R3.2(B<0>) R5.1(A<0>) R6.1(A<0>) R10.2(B<0>) R12.2(B<0>) R17.1(A<0>) R19.1(A<0>) R20.2(B<0>) R21.2(B<0>) R27.1(A<0>) R30.1(A<0>) R31.1(A<0>) R33.1(A<0>) R34.1(A<0>) R36.1(A<0>) R38.1(A<0>) REG1.2(GND) SFP1.1 SFP1.2 SFP1.3 SFP1.4 SFP1.5 SFP1.6 SFP1.7 SFP1.8 SFP1.9 SFP1.10 SFP1.11 SFP1.12 SFP1.13 SFP1.14 SFP1.15 SFP1.16 SFP1.17 SFP1.18 SFP1.19 SFP1.20
P1V8: C12.2(B<0>) C13.2(B<0>) C14.2(B<0>) C19.2(B<0>) C20.2(B<0>) C65.2(B<0>) C117.2(B<0>) IC1.2(VREF1) IC4.21 IC4.32 IC4.39 IC4.40 IC16.1(VCCA) R13.2(B<0>) R14.2(B<0>) R15.2(B<0>) R16.2(B<0>) R40.1(A<0>) R41.1(A<0>) REG1.5(OUT)
P3V3: C3.1(A<0>) C4.1(A<0>) C5.1(A<0>) C6.1(A<0>) C7.2(B<0>) C8.2(B<0>) C9.2(B<0>) C10.2(B<0>) C15.2(B<0>) C29.2(B<0>) C30.2(B<0>) C31.2(B<0>) C32.2(B<0>) C33.2(B<0>) C34.2(B<0>) C35.2(B<0>) C36.2(B<0>) C37.2(B<0>) C40.2(B<0>) C41.2(B<0>) C45.2(B<0>) C46.2(B<0>) C47.2(B<0>) C48.2(B<0>) C49.2(B<0>) C54.1(A<0>) C55.1(A<0>) C56.1(A<0>) C57.2(B<0>) C58.2(B<0>) C59.2(B<0>) C60.2(B<0>) C66.2(B<0>) C69.2(B<0>) C70.2(B<0>) C71.2(B<0>) C72.2(B<0>) C107.2(B<0>) IC3.9 IC4.8 IC4.9 IC4.18(VDDO0) IC4.23(VDDO1) IC4.26 IC4.29(VDDO2) IC4.34(VDDO3) IC5.5(VCC) IC6.5(VCC) IC7.5(VCC) IC8.8 IC9.14 IC10.1 IC12.1 IC12.2 IC12.10(REFCLKP) IC12.12 IC12.18 IC12.24 IC12.31 IC12.32 IC13.5 IC13.8 IC13.13 IC13.16 IC14.1(VCCA) IC15.8(VCCB) IC17.5 IC17.8 IC17.13 IC17.16 J8.2(A<1>) L1.2(B<0>) L2.1(A<0>) P1.C39(C<39>) P1.D36(D<36>) P1.D38(D<38>) P1.D40(D<40>) QZ1.1(EN) QZ1.6 R4.2(B<0>) R22.1(A<0>) R23.1(A<0>) R24.2(B<0>) R25.2(B<0>) R28.1(A<0>) R29.1(A<0>) R32.2(B<0>) R35.2(B<0>) R37.2(B<0>) R56.2(B<0>) R57.2(B<0>) R140.1(A<0>) R411.1(A<0>) REG1.1(IN) REG1.3(EN)
P12V: P1.C35(C<35>) P1.C37(C<37>)
VCC: IC11.5
CDR_LOL: IC10.6(2A<0>) IC11.1(A<0>) IC12.16(LOL)
CDR_LOS: IC10.7(2A<0>) IC11.3(A<0>) IC12.22(LOS)
CLK_IN0_N: C26.2(B<0>) IC4.44(IN0*) R9.2(B<0>) TP8.1(A<0>)
CLK_IN0_P: C23.2(B<0>) IC4.43(IN0) R9.1(A<0>) TP7.1(A<0>)
CLK_IN1_N: C27.2(B<0>) IC4.2(IN1*) J3.2(A<1>) R11.1(A<0>)
CLK_IN1_P: C24.2(B<0>) IC4.1(IN1) J3.3(A<2>) R11.2(B<0>)
CLK_IN2_N: C28.2(B<0>) IC4.11(IN2*) R8.2(B<0>) TP6.1(A<0>)
CLK_IN2_P: C22.2(B<0>) IC4.10(IN2) R8.1(A<0>) TP5.1(A<0>)
CLK_RST: IC4.17(RST*) IC16.3(A) R16.1(A<0>)
CLK_SCL: IC1.3(SCL1) IC4.14(SCLK) R14.1(A<0>) R41.2(B<0>)
CLK_SDA: IC1.4(SDA1) IC4.13(SDA/SDIO) R15.1(A<0>) R40.2(B<0>)
CTRLVCC: P1.D32(D<32>)
CVCC: C16.2(B<0>) C17.2(B<0>) C18.2(B<0>) C61.2(B<0>) C67.2(B<0>) C68.2(B<0>) IC2.8(VCC) IC10.2(1DIR) IC10.3(2DIR) IC10.16 IC14.6(VCCB) IC15.1(VCCA) IC16.6(VCCB) J8.3(A<2>) P1.G39(G<39>) P1.H40(H<40>) R1.2(B<0>) R39.2(B<0>) R42.2(B<0>) R43.2(B<0>) R103.2(B<0>) R138.2(B<0>) R142.2(B<0>) R143.2(B<0>) R242.2(B<0>) R1328.2(B<0>)
F_CDR_CLK_N: IC12.25(CLKOUTN) R55.1(A<0>)
F_CDR_CLK_P: IC12.26(CLKOUTP) R54.1(A<0>)
F_CDR_D_N: R53.2(B<0>)
F_CDR_D_P: R52.2(B<0>)
F_FMC_CLK_N: IC4.42(IN3/FB_IN*) P1.G7(G<7>) R18.1(A<0>)
F_FMC_CLK_P: IC4.41(IN3/FB_IN) P1.G6(G<6>) R18.2(B<0>)
F_GPIO_OUT0_N: IC8.4(RIM<0>) P1.G10(G<10>) R45.1(A<0>)
F_GPIO_OUT0_P: IC8.3(RIP<0>) P1.G9(G<9>) R45.2(B<0>)
F_GPIO_OUT1_N: IC8.1(RIM<0>) P1.H8(H<8>) R46.1(A<0>)
F_GPIO_OUT1_P: IC8.2(RIP<0>) P1.H7(H<7>) R46.2(B<0>)
F_MCX_CLK_N: C26.1(A<0>) IC5.6(Q*)
F_MCX_CLK_P: C23.1(A<0>) IC5.1(Q)
F_RJ45_CLK_N: C28.1(A<0>) J1.2(A<1>)
F_RJ45_CLK_P: C22.1(A<0>) J1.1(A<0>)
F_RJ45_D_N: J1.5(A<4>) P1.G19(G<19>)
F_RJ45_D_P: J1.4(A<3>) P1.G18(G<18>)
F_SFP_N: IC13.4(IN*) J4.12(RD-)
F_SFP_P: IC13.1(IN) J4.13(RD+)
FMC_DI_N: P1.H23(H<23>)
FMC_DI_P: P1.H22(H<22>)
FMC_GA0: IC2.2(A1) P1.C34(C<34>) R138.1(A<0>)
FMC_GA1: IC2.1(A0) P1.D35(D<35>) R1328.1(A<0>)
FMC_LA07_N: IC15.3(SDAA) P1.H14(H<14>) R142.1(A<0>) TP2.1(A<0>)
FMC_LA07_P: IC15.2(SCLA) P1.H13(H<13>) R143.1(A<0>) TP4.1(A<0>)
FMC_LA11_N: IC1.5(SDA2) P1.H17(H<17>) R242.1(A<0>) TP1.1(A<0>)
FMC_LA11_P: IC1.6(SCL2) P1.H16(H<16>) R43.1(A<0>) TP3.1(A<0>)
FMC_SCL: IC2.6(SCL) J5.3(A<2>) P1.C30(C<30>) R103.1(A<0>)
FMC_SDA: IC2.5(SDA) J6.3(A<2>) P1.C31(C<31>) R39.1(A<0>)
FPGA_CDR_LOL: IC10.11(2B<0>) P1.G12(G<12>)
FPGA_CDR_LOS: IC10.10(2B<0>) P1.G13(G<13>)
FPGA_CLK_RST: IC16.4(B) P1.G30(G<30>)
FPGA_SFP_LOS: IC10.12(1B<0>) P1.D14(D<14>)
FPGA_SFP_TX_DIS: IC14.4(B) P1.D17(D<17>)
FPGA_SFP_TX_FLT: IC10.13(1B<0>) P1.D18(D<18>)
GPIO_IN0_N: IC6.6(Q*) P1.C11(C<11>)
GPIO_IN0_P: IC6.1(Q) P1.C10(C<10>)
GPIO_IN1_N: IC7.6(Q*) P1.D12(D<12>)
GPIO_IN1_P: IC7.1(Q) P1.D11(D<11>)
IN_N: C44.2(B<0>) IC12.4(NIN)
IN_P: C43.2(B<0>) IC12.5(PIN)
IN_SEL0: IC4.3(IN_SEL0) R17.2(B<0>)
IN_SEL1: IC4.37(IN_SEL1) R19.2(B<0>)
OSC_CLK_N: C25.2(B<0>) IC4.6(XB) J2.2(A<1>) R7.2(B<0>)
OSC_CLK_P: C21.2(B<0>) IC4.5(XA) J2.3(A<2>) R7.1(A<0>)
REC_CLK_N: C27.1(A<0>) IC17.11(Q0*)
REC_CLK_P: C24.1(A<0>) IC17.12(Q0)
S_CLK_IN: C50.1(A<0>) PX1.1(A) R27.2(B<0>)
S_GPIO_IN0: IC6.3(+IN) PX2.1(A) R30.2(B<0>)
S_GPIO_IN1: IC7.3(+IN) PX3.1(A) R31.2(B<0>)
SFP_LOS: IC10.5(1A<0>) J4.8(LOS) R23.2(B<0>)
SFP_SCL: IC12.20(SCK) IC15.7(SCLB) J4.5(MOD_DEF1/SCL) J5.1(A<0>) R411.2(B<0>)
SFP_SDA: IC12.21(SDA) IC15.6(SDAB) J4.4(MOD_DEF2/SDA) J6.1(A<0>) R140.2(B<0>)
SFP_TX_DISABLE: IC14.3(A) J4.3(TX_DISABLE) R28.2(B<0>)
SFP_TX_FAULT: IC10.4(1A<0>) J4.2(TX_FAULT) R29.2(B<0>)
SY5860_IN_N: IC17.4(IN*) R55.2(B<0>)
SY5860_IN_P: IC17.1(IN) R54.2(B<0>)
T_CDR_N: C44.1(A<0>) IC13.9(Q1*)
T_CDR_P: C43.1(A<0>) IC13.10(Q1)
T_FFD_CLK_N: IC3.2(CLK*) IC4.19(OUT0*)
T_FFD_CLK_P: IC3.3(CLK) IC4.20(OUT0)
T_FFD_D_N: IC3.6(D*) P1.G22(G<22>)
T_FFD_D_P: IC3.7(D) P1.G21(G<21>)
T_FMC_CLK_N: IC4.24(OUT1*) P1.H5(H<5>)
T_FMC_CLK_P: IC4.25(OUT1) P1.H4(H<4>)
T_FMC_N: IC13.11(Q0*)
T_FMC_P: IC13.12(Q0)
T_FMC_REC_CLK_N: IC17.9(Q1*) P1.G3(G<3>)
T_FMC_REC_CLK_P: IC17.10(Q1) P1.G2(G<2>)
T_MCX_CLK: IC9.11(A<0>) IC9.13(A<0>) R26.2(B<0>)
T_RJ45_CLK_N: IC4.30(OUT2*) J1.6(A<5>)
T_RJ45_CLK_P: IC4.31(OUT2) J1.3(A<2>)
T_RJ45_D_N: J1.8(A<7>) P1.H29(H<29>)
T_RJ45_D_P: J1.7(A<6>) P1.H28(H<28>)
T_SFP_N: C2.2(B<0>) J4.19(TD-)
T_SFP_P: C1.2(B<0>) J4.18(TD+)
UNNAMED_2_CON400P40ABCDEFGHJK_I: P1.D30(D<30>) P1.D31(D<31>)
UNNAMED_2_PCA9306_I276_EN: IC1.7(VREF2) IC1.8(EN) R1.1(A<0>)
UNNAMED_2_PCA9517_I162_EN: IC15.5(EN) R42.1(A<0>)
UNNAMED_3_CAPCERSMDCL2_I315_A: C1.1(A<0>) IC3.10(Q) R5.2(B<0>)
UNNAMED_3_CAPCERSMDCL2_I316_A: C2.1(A<0>) IC3.11(Q*) R6.2(B<0>)
UNNAMED_3_NBSG53A_I298_OLS: IC3.13(OLS) R3.1(A<0>)
UNNAMED_3_NBSG53A_I298_R: IC3.15(R) R2.2(B<0>)
UNNAMED_3_NBSG53A_I298_SEL: IC3.14(SEL) R4.1(A<0>)
UNNAMED_3_NBSG53A_I298_VTCLK: IC3.1(VTCLK*) IC3.4(VTCLK)
UNNAMED_3_NBSG53A_I298_VTD: IC3.5(VTD*) IC3.8(VTD)
UNNAMED_4_CAPCERSMDCL2_I90_B: C11.2(B<0>) REG1.4(NR)
UNNAMED_4_CAPCERSMDCL2_I119_A: C21.1(A<0>) QZ1.4(OUTP)
UNNAMED_4_CAPCERSMDCL2_I120_A: C25.1(A<0>) QZ1.5(OUTN)
UNNAMED_4_RSMD0402_I16_A: IC4.12(OE*) R10.1(A<0>)
UNNAMED_4_RSMD0402_I47_A: IC4.38(I2C_SEL) R13.1(A<0>)
UNNAMED_4_RSMD0402_I49_A: IC4.15(A1/SDO) R20.1(A<0>)
UNNAMED_4_RSMD0402_I50_A: IC4.16(A0/CS) R21.1(A<0>)
UNNAMED_4_RSMD0402_I123_A: IC4.36(OUT3) R26.1(A<0>)
UNNAMED_4_SI5344_I110_INTR: IC4.33(INTR*) TP9.1(A<0>)
UNNAMED_4_SI5344_I110_LOL: IC4.27(LOL*) TP10.1(A<0>)
UNNAMED_4_SI5344_I110_LOSXAXB: IC4.28(LOS_XAXB*) TP11.1(A<0>)
UNNAMED_5_74LCX04_I304_Y: IC9.10(Y*<0>) IC9.12(Y*<0>) R47.1(A<0>)
UNNAMED_5_74LCX04_I317_A: IC8.7(RO<0>) IC9.1(A<0>) IC9.3(A<0>)
UNNAMED_5_74LCX04_I317_Y: IC9.2(Y*<0>) IC9.4(Y*<0>) R49.1(A<0>)
UNNAMED_5_74LCX04_I323_A: IC8.6(RO<0>) IC9.5(A<0>) IC9.9(A<0>)
UNNAMED_5_74LCX04_I323_Y: IC9.6(Y*<0>) IC9.8(Y*<0>) R48.1(A<0>)
UNNAMED_5_ADCMP604_I256_: C51.2(B<0>) IC5.4(-IN) R32.1(A<0>) R33.2(B<0>) R44.1(A<0>)
UNNAMED_5_ADCMP604_I256__1: C50.2(B<0>) IC5.3(+IN) R44.2(B<0>)
UNNAMED_5_ADCMP604_I285_: C52.2(B<0>) IC6.4(-IN) R35.1(A<0>) R36.2(B<0>)
UNNAMED_5_ADCMP604_I294_: C53.2(B<0>) IC7.4(-IN) R37.1(A<0>) R38.2(B<0>)
UNNAMED_5_PCOAX_I312_A: PX4.1(A) R47.2(B<0>)
UNNAMED_5_PCOAX_I315_A: PX6.1(A) R49.2(B<0>)
UNNAMED_5_PCOAX_I321_A: PX5.1(A) R48.2(B<0>)
UNNAMED_11_ADN2814_I23_CF1: C39.1(A<0>) IC12.15(CF1)
UNNAMED_11_ADN2814_I23_CF2: C39.2(B<0>) IC12.14(CF2)
UNNAMED_11_ADN2814_I23_DATAOUTN: IC12.28(DATAOUTN) R53.1(A<0>)
UNNAMED_11_ADN2814_I23_DATAOUTP: IC12.29(DATAOUTP) R52.1(A<0>)
UNNAMED_11_ADN2814_I23_SADDRS: IC12.19(SADDRS) R57.1(A<0>)
UNNAMED_11_ADN2814_I23_SQUELCH: IC12.27(SQUELCH) R12.1(A<0>)
UNNAMED_11_ADN2814_I23_THRADJ: C42.2(B<0>) IC12.9(THRADJ) R34.2(B<0>)
UNNAMED_11_ADN2814_I23_VREF: C38.2(B<0>) IC12.3(VREF)
UNNAMED_11_CON20PSFP_I175_MODDE: J4.6(MOD_DEF0/MOD_ABS) R25.1(A<0>)
UNNAMED_11_CON20PSFP_I175_RATES: J4.7(RATE_SELECT/RS0) R24.1(A<0>)
UNNAMED_11_CON20PSFP_I175_VCCR: C63.2(B<0>) C64.2(B<0>) J4.15(VCCR) L1.1(A<0>)
UNNAMED_11_CON20PSFP_I175_VCCT: C62.2(B<0>) J4.16(VCCT) L2.2(B<0>)
UNNAMED_11_CON20PSFP_I175_VEER: J4.9(VEER/RS1) R22.2(B<0>)
UNNAMED_11_LED1_I225_A: LD1.1(A) R50.1(A<0>)
UNNAMED_11_LED1_I226_A: LD2.1(A) R51.1(A<0>)
UNNAMED_11_LED1_I227_A: LD3.1(A) R56.1(A<0>)
UNNAMED_11_RSMD0402_I232_B: IC11.6(Y<0>) R50.2(B<0>)
UNNAMED_11_RSMD0402_I233_B: IC11.4(Y<0>) R51.2(B<0>)

Pads without a net: IC2 7; IC3 17; IC4 4 7 22 35; IC13 2 3; IC17 2 3; P1 A2 A3 A6 A7 A10 A11 A14 A15 A18 A19 A22 A23 A26 A27 A30 A31 A34 A35 A38 A39 B1 B4 B5 B8 B9 B12 B13 B16 B17 B20 B21 B24 B25 B28 B29 B32 B33 B36 B37 B40 C2 C3 C6 C7 C14 C15 C18 C19 C22 C23 C26 C27 D1 D4 D5 D8 D9 D15 D20 D21 D23 D24 D26 D27 D29 D33 D34 E2 E3 E6 E7 E9 E10 E12 E13 E15 E16 E18 E19 E21 E22 E24 E25 E27 E28 E30 E31 E33 E34 E36 E37 E39 F1 F4 F5 F7 F8 F10 F11 F13 F14 F16 F17 F19 F20 F22 F23 F25 F26 F28 F29 F31 F32 F34 F35 F37 F38 F40 G15 G16 G24 G25 G27 G28 G31 G33 G34 G36 G37 H1 H10 H11 H19 H20 H25 H26 H31 H32 H34 H35 H37 H38 J2 J3 J6 J7 J9 J10 J12 J13 J15 J16 J18 J19 J21 J22 J24 J25 J27 J28 J30 J31 J33 J34 J36 J37 J39 K1 K4 K5 K7 K8 K10 K11 K13 K14 K16 K17 K19 K20 K22 K23 K25 K26 K28 K29 K31 K32 K34 K35 K37 K38 K40; QZ1 2; SFP1 NC

## Via types
v1: diameter 0.6, hole 0.3, TOP to BOTTOM, 491 vias

## Routing (per net, layer and track width the routed paths; a pad name or vN(x,y) marks a point on that pad's centre or on a via; arc(x,y) is an arc through that point)
GND: length 454.5
  TOP w0.3: v1(58.33,6.4) C9.1 56.86,6.4 56.81,6.45 REG1.2 ; C48.1 32.96,13.1 v1(32.96,14.43) ; v1(45.44,39.73) 45.44,40.82 45.46,40.85 ; C11.1 v1(55.15,8.75) ; C56.2 v1(56.96,49.99) ; C55.2 R19.1 33.95,13.13 33.95,14.02 v1(34.36,14.43) 34.77,14.02 35.66,14.02 C45.1 ; C16.1 52.08,37.22 v1(51.57,36.71) ; C69.1 38.42,30.41 v1(37.9,30.93) 38.42,31.45 C70.1 ; PX3.2 v1(52.57,52.61) ; PX2.2 v1(49.01,58.7) ; C32.1 35.79,15.55 34.77,15.55 v1(34.36,15.95) ; C31.1 30.11,17.35 v1(31.44,17.35) ; C59.1 v1(26.48,63.45) 26.48,62.61 26.78,62.31 C60.1 ; C14.1 v1(47.04,7.3) ; PX3.3 v1(52.6,49.66) ; v1(31.44,17.35) 30.67,18.11 30.54,18.11 30.29,18.36 R10.2 ; v1(31.44,17.35) R20.2 ; C57.1 C58.1 49.66,63.76 49.22,63.33 v1(49.22,62.18) ; v1(37.91,47.45) 38.17,47.7 C62.1 ; C117.1 37.21,22.36 v1(36.77,21.92) 36.39,22.3 C17.1 ; PX5.2 v1(41.01,58.42) ; v1(44.9,45.16) 45.28,45.55 C15.1 ; v1(54.68,21.55) 55.64,21.55 C67.1 ; C64.1 39.93,51.41 41.8,53.28 ; LD2.2 v1(44.39,54.69) ; C107.1 v1(50.11,38.69) ; R21.2 32.55,18.91 32.55,17.76 v1(32.96,17.35) ; C36.1 28.64,28.6 v1(28.64,29.67) 30.11,29.67 C29.1 ; C13.1 v1(48.34,7.31) ; C61.1 54.68,44.22 v1(53.73,44.22) ; v1(26.36,31.96) 26.36,33.3 C37.1 C30.1 ; PX4.2 v1(17.01,63.66) ; PX6.2 v1(41.04,63.12) ; C12.1 v1(50.44,8.21) ; C49.1 33.72,18.08 v1(34.44,17.37) 34.99,17.92 34.99,18.24 35.12,18.37 C46.1 ; C65.1 58.67,21.55 v1(59.75,21.55) ; C63.1 41.31,48.97 SFP1.19 ; C72.1 v1(36.32,34.37) ; PX1.3 v1(41.55,6.38) ; C7.1 C8.1 45.97,18.18 46.68,17.48 v1(47.57,17.48) ; LD1.2 v1(46.3,54.69) ; 45.46,43.51 v1(45.46,44.46) ; C20.1 v1(44.44,7.24) ; LD3.2 v1(47.82,54.69) ; C18.1 v1(58.23,16.59) ; PX1.2 v1(41.55,3.43) ; PX5.3 v1(41.01,61.37) ; R17.1 v1(31.44,14.43) ; QZ1.3 v1(18.14,15.79) ; C19.1 v1(45.74,7.27) ; C34.1 v1(31.94,36.53) ; PX2.3 v1(52.6,55.75) ; PX4.3 v1(17.29,60.71) ; PX6.3 v1(41.01,66.07)
  L2GND w0.4: 3.65,49.94 SFP1.11 ; SFP1.11 4.7,50.99 ; SFP1.11 5.75,49.94 ; SFP1.11 4.7,48.88 ; J1.10 9.22,29.94 ; J1.10 6.56,29.94 ; J1.10 7.89,31.27 ; J1.10 7.89,28.61 ; SFP1.14 32.2,42.33 ; SFP1.14 31.22,41.36 ; SFP1.14 33.18,41.36 ; SFP1.14 32.2,40.38 ; 21.02,25.47 J5.2 ; J5.2 19.99,26.5 ; J5.2 22.05,26.5 ; J5.2 21.02,27.52 ; SFP1.5 9.7,56.66 ; SFP1.5 9.7,54.55 ; SFP1.5 8.65,55.61 ; SFP1.5 10.75,55.61 ; SFP1.4 5.75,41.36 ; SFP1.4 4.7,40.3 ; SFP1.4 3.65,41.36 ; SFP1.4 4.7,42.41 ; 40.82,43.68 41.8,43.68 ; 41.8,43.68 41.8,44.66 ; 41.8,43.68 41.8,42.7 ; 41.8,43.68 42.78,43.68 ; 36.22,41.36 SFP1.16 ; SFP1.16 37.2,42.33 ; SFP1.16 38.18,41.36 ; SFP1.16 37.2,40.38 ; 36.22,55.61 SFP1.17 ; SFP1.17 37.2,56.58 ; SFP1.17 38.18,55.61 ; SFP1.17 37.2,54.63 ; 31.22,55.61 SFP1.15 ; SFP1.15 32.2,54.63 ; SFP1.15 32.2,56.58 ; SFP1.15 33.18,55.61 ; J6.2 21.02,36.54 ; J6.2 19.99,35.51 ; J6.2 22.05,35.51 ; J6.2 21.02,34.48 ; SFP1.12 28.48,41.36 ; SFP1.12 27.5,42.33 ; SFP1.12 26.52,41.36 ; SFP1.12 27.5,40.38 ; 41.8,53.28 42.78,53.28 ; 41.8,53.28 41.8,52.3 ; 41.8,53.28 41.8,54.26 ; 41.8,53.28 40.82,53.28 ; SFP1.13 28.48,55.61 ; SFP1.13 27.5,56.58 ; SFP1.13 26.52,55.61 ; SFP1.13 27.5,54.63 ; J8.1 21.1,5.53 ; J8.1 21.1,3.47 ; J8.1 20.07,4.5 ; J8.1 22.13,4.5 ; J3.1 17.01,7.73 ; J3.1 14.95,7.73 ; J3.1 15.98,6.7 ; J3.1 15.98,8.76 ; 18.65,55.61 SFP1.6 ; SFP1.6 20.75,55.61 ; SFP1.6 19.7,54.55 ; SFP1.6 19.7,56.66 ; 33.76,41.36 SFP1.1 ; SFP1.1 35.64,41.36 ; SFP1.1 34.7,40.42 ; SFP1.1 34.7,42.3 ; J2.1 25.39,20.44 ; J2.1 24.36,19.42 ; J2.1 26.42,19.42 ; J2.1 25.39,18.39 ; J1.9 7.89,16.39 ; J1.9 9.22,15.06 ; J1.9 6.56,15.06 ; J1.9 7.89,13.73 ; 14.7,40.3 SFP1.3 ; SFP1.3 15.75,41.36 ; SFP1.3 13.65,41.36 ; SFP1.3 14.7,42.41 ; 24.7,51.38 SFP1.10 ; SFP1.10 24.7,53.49 ; SFP1.10 23.65,52.44 ; SFP1.10 25.75,52.44 ; 24.7,45.98 SFP1.9 ; SFP1.9 24.7,48.09 ; SFP1.9 25.75,47.04 ; SFP1.9 23.65,47.04 ; SFP1.8 40.75,55.61 ; SFP1.8 39.7,54.55 ; SFP1.8 39.7,56.66 ; SFP1.8 38.65,55.61 ; SFP1.2 24.7,42.41 ; SFP1.2 25.75,41.36 ; SFP1.2 24.7,40.3 ; SFP1.2 23.65,41.36 ; SFP1.7 30.75,55.61 ; SFP1.7 29.7,54.55 ; SFP1.7 28.65,55.61 ; SFP1.7 29.7,56.66 ; 41.8,47.5 SFP1.19 ; SFP1.19 40.82,48.48 ; SFP1.19 42.78,48.48 ; SFP1.19 41.8,49.46
  BOTTOM w0.3: IC13.14 37.65,33.23 ; 37.65,33.23 37.91,33.23 38.15,32.98 IC13.15 ; 37.65,33.23 v1(37.65,33.98) ; P1.J40 v1(62.5,9.13) ; IC12.33 26.29,32.08 IC12.23 ; IC12.33 27.29,30.58 ; IC12.33 28.29,30.08 ; IC12.33 28.29,31.58 IC12.30 ; P1.G29 v1(65.04,23.11) ; v1(68.85,58.65) 68.87,58.65 P1.D2 ; P1.E11 v1(67.58,47.23) ; R3.2 v1(46.96,14.08) ; P1.H24 v1(63.77,29.45) ; P1.H6 v1(63.77,53.59) ; P1.J4 v1(62.5,56.12) ; v1(72.66,9.13) P1.A40 ; P1.E14 v1(67.58,43.42) ; v1(36.64,39.45) 36.64,39.06 36.89,38.81 IC17.7 36.89,37 IC17.17 ; P1.C36 v1(70.12,14.21) ; P1.K36 v1(61.23,14.21) ; P1.G32 v1(66.31,19.3) ; 28.79,29.58 29.29,29.08 29.54,29.08 29.54,29.08 IC12.8 ; 28.79,29.58 IC12.7 ; 28.79,29.58 28.29,30.08 ; IC17.14 36.89,36.5 IC17.17 ; v1(32.07,58.37) 32.07,59.13 32.49,59.55 IC9.7 ; P1.C32 v1(70.12,19.3) P1.C33 ; IC12.13 27.29,30.58 ; 27.29,30.58 25.79,29.08 25.54,29.08 25.54,29.08 IC12.17 ; SFP1.19 40.78,49.5 J4.14 ; IC16.5 v1(54.68,21.55) ; P1.J35 v1(62.5,15.48) ; P1.G1 v1(65.04,59.94) ; v1(45.46,44.46) 45.46,43.47 IC14.5 ; P1.J14 v1(62.5,42.16) ; P1.C24 v1(70.12,29.45) ; P1.C1 70.75,59.3 70.12,59.92 v1(70.12,59.94) ; P1.K3 v1(61.23,57.4) ; P1.C20 v1(70.12,35.8) ; J4.10 30.32,52.3 29.91,51.9 v1(28.64,51.9) ; IC2.4 v1(54.51,11.3) ; P1.K9 v1(60.77,49.14) ; IC3.16 44.69,17.02 44.48,16.8 v1(43.92,16.8) ; P1.K6 v1(61.23,53.59) ; v1(71.39,15.48) P1.B35 ; P1.E40 v1(67.58,9.13) ; P1.C8 v1(70.12,51.05) ; IC1.1 36.12,22.61 36.77,21.96 v1(36.77,21.92) ; IC5.2 v1(31.94,5.92) ; IC13.17 37.65,30.63 IC13.7 ; IC13.17 38.15,30.63 IC13.6 ; IC13.17 v1(37.9,30.93) ; R30.1 54.51,55.75 v1(52.6,55.75) ; R31.1 v1(53.8,49.62) ; P1.A36 v1(72.66,14.21) ; R12.2 v1(27.02,38.66) ; P1.K27 v1(61.23,25.64) ; P1.F33 v1(67.58,19.3) P1.E32 ; P1.A25 v1(72.66,28.18) ; R27.1 v1(37.79,6.56) ; v1(44.9,45.16) 45.31,45.58 IC11.2 ; P1.C13 v1(70.12,44.7) ; R34.1 29.17,24.86 28.96,24.65 v1(28.96,23.9) ; P1.B19 v1(71.39,37.08) ; P1.J5 v1(62.5,53.59) ; P1.H9 v1(63.77,48.51) ; P1.A17 v1(72.66,39.62) ; IC10.9 v1(53.68,47.47) ; 28.29,30.08 IC12.6 ; 28.29,30.08 IC12.11 ; v1(65.04,39.62) P1.G17 P1.H18 ; P1.A21 v1(72.66,34.53) ; R2.1 v1(44.56,14.09) ; P1.H21 v1(63.77,34.53) P1.J20 ; C51.1 v1(33.85,0.97) ; J4.1 30.32,45.1 v1(29.79,44.56) ; P1.A16 v1(72.66,40.88) ; P1.B23 v1(71.39,32) ; P1.E1 v1(67.58,59.94) ; P1.C16 v1(70.12,40.88) ; P1.J11 v1(62.5,45.97) P1.K12 ; IC10.15 v1(56.78,43.56) ; P1.A12 v1(72.66,45.97) ; IC17.17 36.39,37 IC17.6 ; IC17.17 36.39,36.5 IC17.15 ; P1.F30 v1(66.31,21.84) ; P1.F2 v1(66.31,58.66) ; P1.F15 v1(66.31,42.16) ; P1.C29 v1(70.12,23.11) ; C42.1 v1(27.77,24.86) ; v1(51.38,17.73) R6.1 ; P1.E5 v1(67.58,54.85) ; P1.E26 v1(67.58,26.91) ; J4.17 39.74,47.04 38.32,47.04 v1(37.91,47.45) ; P1.D6 v1(68.85,53.59) ; P1.K21 v1(61.23,34.53) ; P1.H2 v1(63.77,58.66) ; C6.2 v1(48.29,35.38) ; P1.G8 v1(65.04,51.05) ; P1.A37 v1(72.66,12.95) ; P1.F3 v1(66.31,57.4) ; P1.G35 v1(65.04,15.48) ; P1.E35 v1(67.58,15.48) ; P1.H33 v1(63.77,19.3) ; C4.2 v1(6.04,32.72) ; v1(47.57,17.48) 47.57,17.99 47.41,18.14 IC3.12 ; P1.K33 v1(61.23,19.3) ; P1.A29 v1(72.66,23.11) ; P1.D37 v1(68.85,12.95) ; P1.B18 v1(71.39,38.34) ; P1.B6 v1(71.39,53.59) ; R5.1 v1(50.17,22.43) ; P1.B27 v1(71.39,25.64) ; P1.C4 v1(70.12,56.12) ; IC6.2 v1(56.58,55.96) ; P1.F9 v1(66.31,49.77) ; P1.A4 v1(72.66,56.12) ; P1.D10 v1(68.85,48.51) ; P1.F12 v1(67.58,44.7) ; P1.D22 v1(68.85,33.27) ; v1(68.85,40.9) 68.85,40.89 P1.D16 ; P1.G38 v1(65.04,11.68) ; P1.B22 v1(71.39,33.27) ; C34.1 v1(31.94,36.53) ; IC10.8 v1(50.85,47.47) ; J4.20 40.78,44.7 41.8,43.68 ; J4.11 v1(38.17,51.9) ; C10.1 v1(36.77,8.21) ; P1.C38 v1(70.12,11.68) ; IC2.3 v1(55.78,11.3) ; P1.E23 v1(67.58,32) ; P1.H39 v1(63.77,10.41) ; v1(72.66,44.7) P1.A13 ; P1.F21 v1(67.58,33.27) ; P1.E38 v1(67.58,11.68) ; P1.H30 v1(63.77,21.84) ; P1.B34 v1(71.39,16.76) ; P1.H3 v1(63.77,57.4) ; P1.G23 v1(65.04,32) ; P1.A33 v1(72.66,18.02) ; P1.H36 v1(63.77,14.21) ; P1.J1 v1(62.5,59.94) ; P1.B2 v1(71.39,58.66) ; P1.B15 v1(71.39,42.16) ; P1.J29 v1(62.5,23.11) ; P1.K18 v1(61.23,37.08) ; P1.A20 v1(72.66,35.8) ; P1.B14 v1(71.39,43.42) ; P1.D39 v1(68.85,10.41) ; P1.K24 v1(61.23,29.45) ; P1.H15 v1(63.77,42.16) ; P1.A9 v1(72.66,48.51) P1.B10 ; P1.G14 v1(65.04,43.42) ; IC14.2 v1(45.44,39.73) ; P1.G5 v1(66.31,54.85) ; P1.F6 v1(67.58,53.59) ; P1.A24 v1(72.66,29.45) ; R33.1 v1(35.12,0.97) ; IC16.2 v1(59.75,21.55) ; P1.C5 v1(70.12,54.85) ; C3.2 v1(6.04,11.89) ; P1.D25 v1(68.85,28.18) ; 55.25,44.22 v1(53.73,44.22) ; P1.G11 v1(66.31,45.97) ; P1.A32 v1(72.66,19.3) ; P1.K39 v1(61.23,10.41) ; P1.D19 v1(68.85,37.08) ; P1.J8 v1(62.5,51.05) ; P1.K15 v1(61.23,42.16) ; C54.2 v1(28.64,1.35) ; P1.B3 v1(71.39,57.4) ; P1.G40 v1(65.04,9.13) ; P1.C28 v1(70.12,24.38) ; v1(71.39,49.77) P1.C9 ; P1.E4 v1(67.58,56.12) ; P1.C25 v1(70.12,28.18) ; IC15.4 v1(51.57,36.71) ; P1.F24 v1(66.31,29.45) ; C52.1 v1(54.42,58.88) ; P1.H12 v1(63.77,45.97) ; P1.A28 v1(72.66,24.38) ; P1.F27 v1(66.31,25.64) ; P1.J38 v1(62.5,11.68) ; P1.B7 v1(71.39,52.31) ; C35.1 v1(16.45,36.91) ; v1(71.39,21.84) P1.B30 ; P1.A5 v1(72.66,54.85) ; P1.G20 v1(66.31,35.8) ; P1.F18 v1(66.31,38.34) ; P1.E17 v1(67.58,39.62) ; P1.E8 v1(67.58,51.05) ; P1.K2 v1(61.23,58.66) ; P1.F36 v1(66.31,14.21) ; IC7.2 v1(56.96,49.99) ; P1.C40 v1(70.12,9.13) ; R36.1 v1(53.15,58.88) ; C47.1 v1(38.04,8.21) ; P1.B26 v1(71.39,26.91) ; C38.1 v1(33.92,34.11) ; IC8.5 v1(49.22,62.18) ; P1.C21 v1(70.12,34.53) ; v1(71.39,10.41) P1.B39 ; C40.1 v1(34.61,31.83) ; P1.G26 v1(65.04,26.91) ; C5.2 v1(47.69,3) ; P1.J26 v1(62.5,26.91) ; P1.J32 v1(62.5,19.3) ; P1.J17 v1(62.5,39.62) ; P1.E20 v1(68.85,34.53) ; P1.A1 v1(72.66,59.94) ; P1.G4 v1(65.04,56.12) ; P1.B11 v1(71.39,45.97) ; P1.B38 v1(71.39,11.68) ; P1.D28 v1(68.85,24.38) ; P1.A8 v1(72.66,51.05) ; P1.J23 v1(62.5,32) ; P1.C12 v1(70.12,45.97) ; P1.D3 v1(68.85,57.4) ; v1(67.58,23.11) P1.E29 ; P1.H27 v1(63.77,26.91) ; P1.B31 v1(71.39,20.57) ; P1.K30 v1(61.23,21.84) ; P1.D13 v1(70.12,43.42) ; P1.D7 v1(68.85,52.31) ; C53.1 v1(55.06,54.56) ; P1.F39 v1(66.31,10.41) ; R38.1 v1(53.79,54.56) ; P1.C17 v1(70.12,39.62)
  vias: v1(26.48,29.67) v1(27.5,30.81) v1(28.64,31.96) v1(31.44,15.95) v1(36.26,37.16) v1(37.02,36.4)
